# Altium PCB SQUIDCtr_Rev0.PcbDoc (part 1 of 4)
Units mil, origin at the board's own origin, x right, y up, seen from the top; angles counter-clockwise.
Board outline 5765 x 2940 mil, 6 copper layers (Top Layer, Internal Plane 1, Mid-Layer 1, InternalPlane 2, Mid-Layer 2, Bottom Layer), stack 62.5 mil thick; 583 components, 307 nets, 1511 pads, 451 vias.
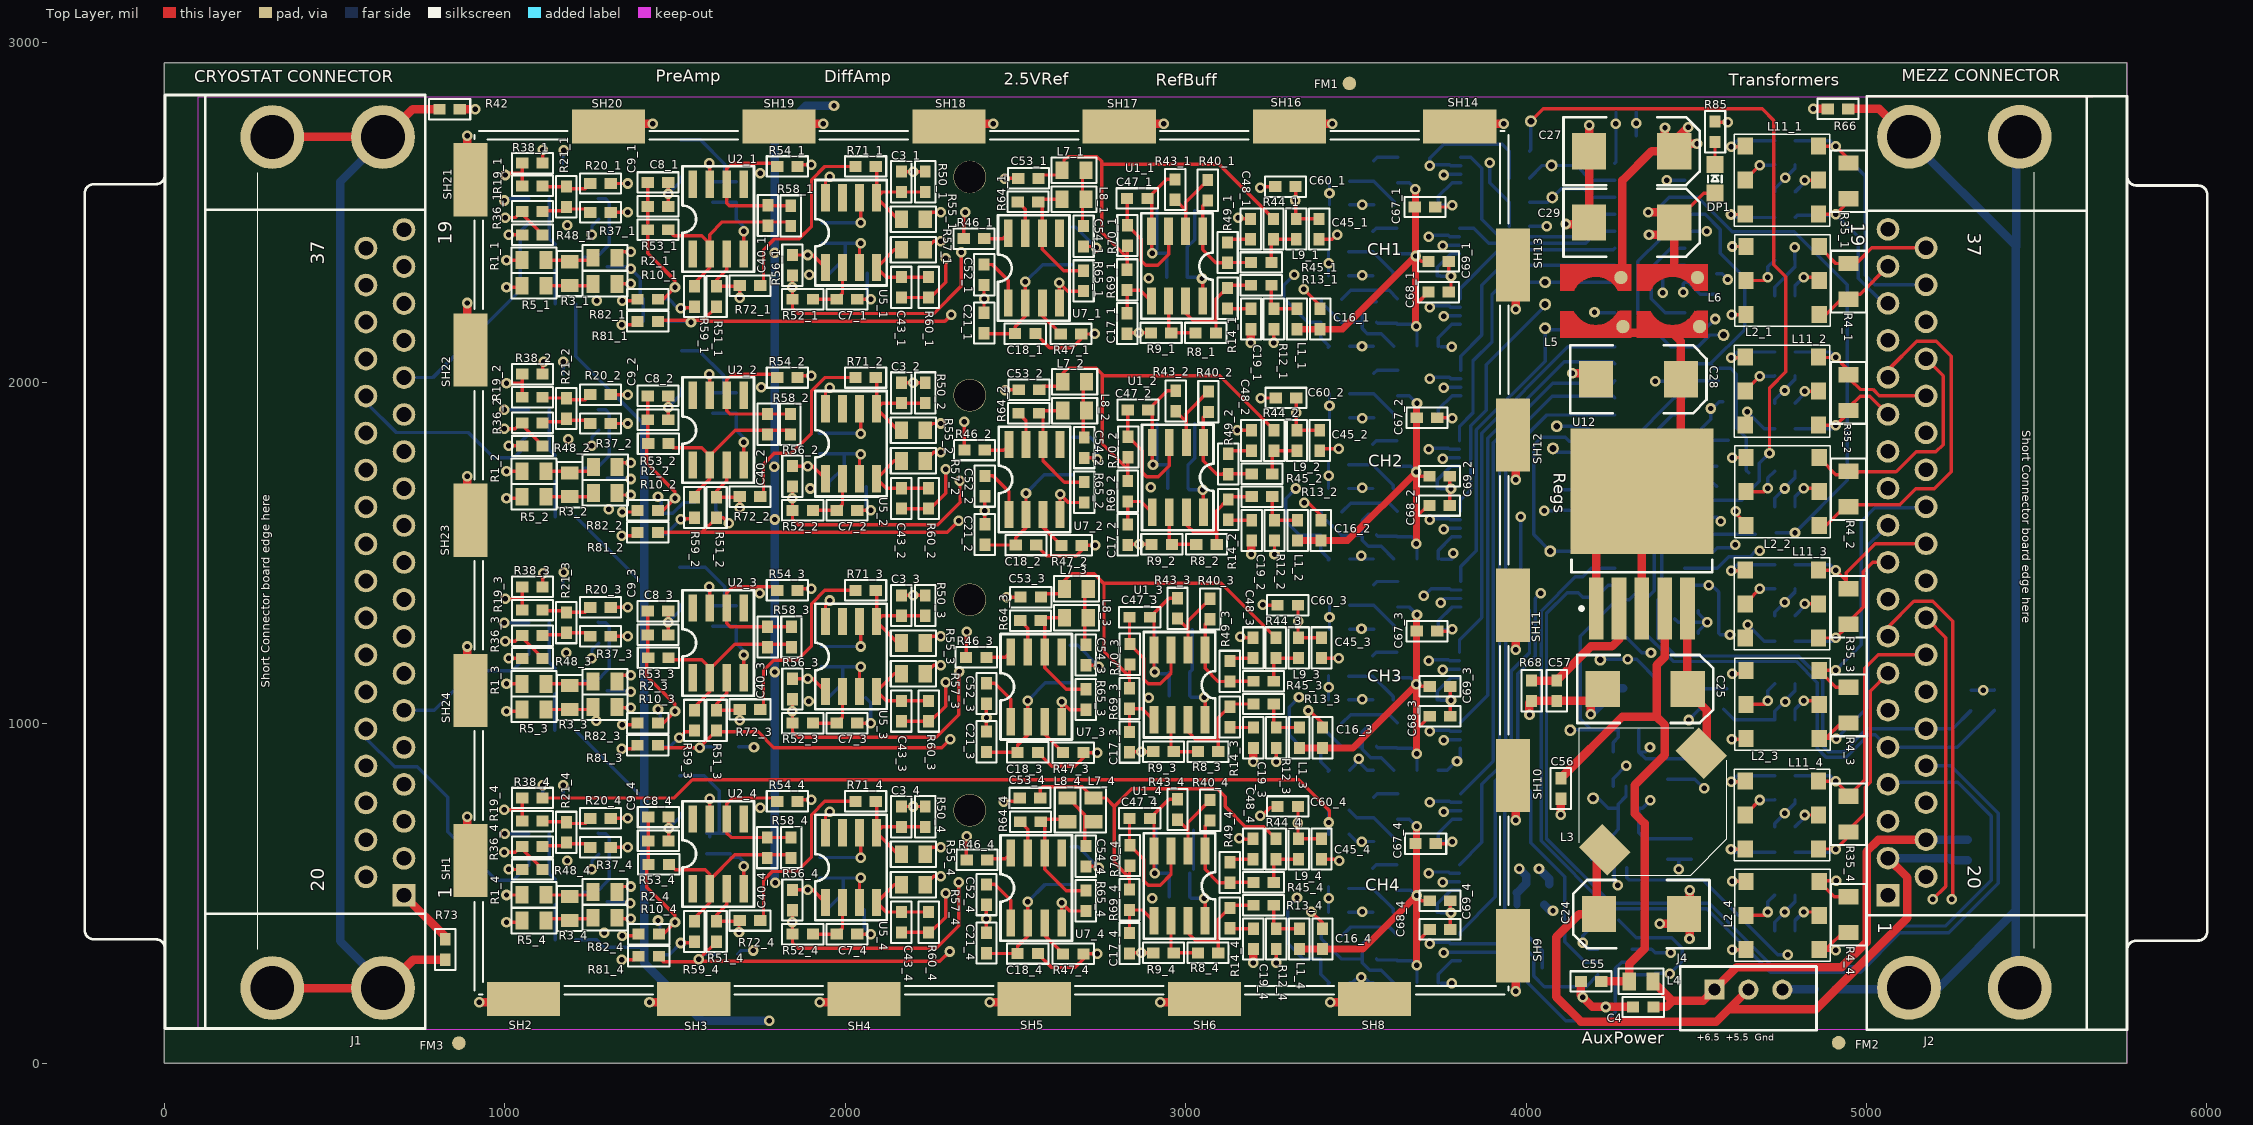
[diagram p0: Top Layer view]
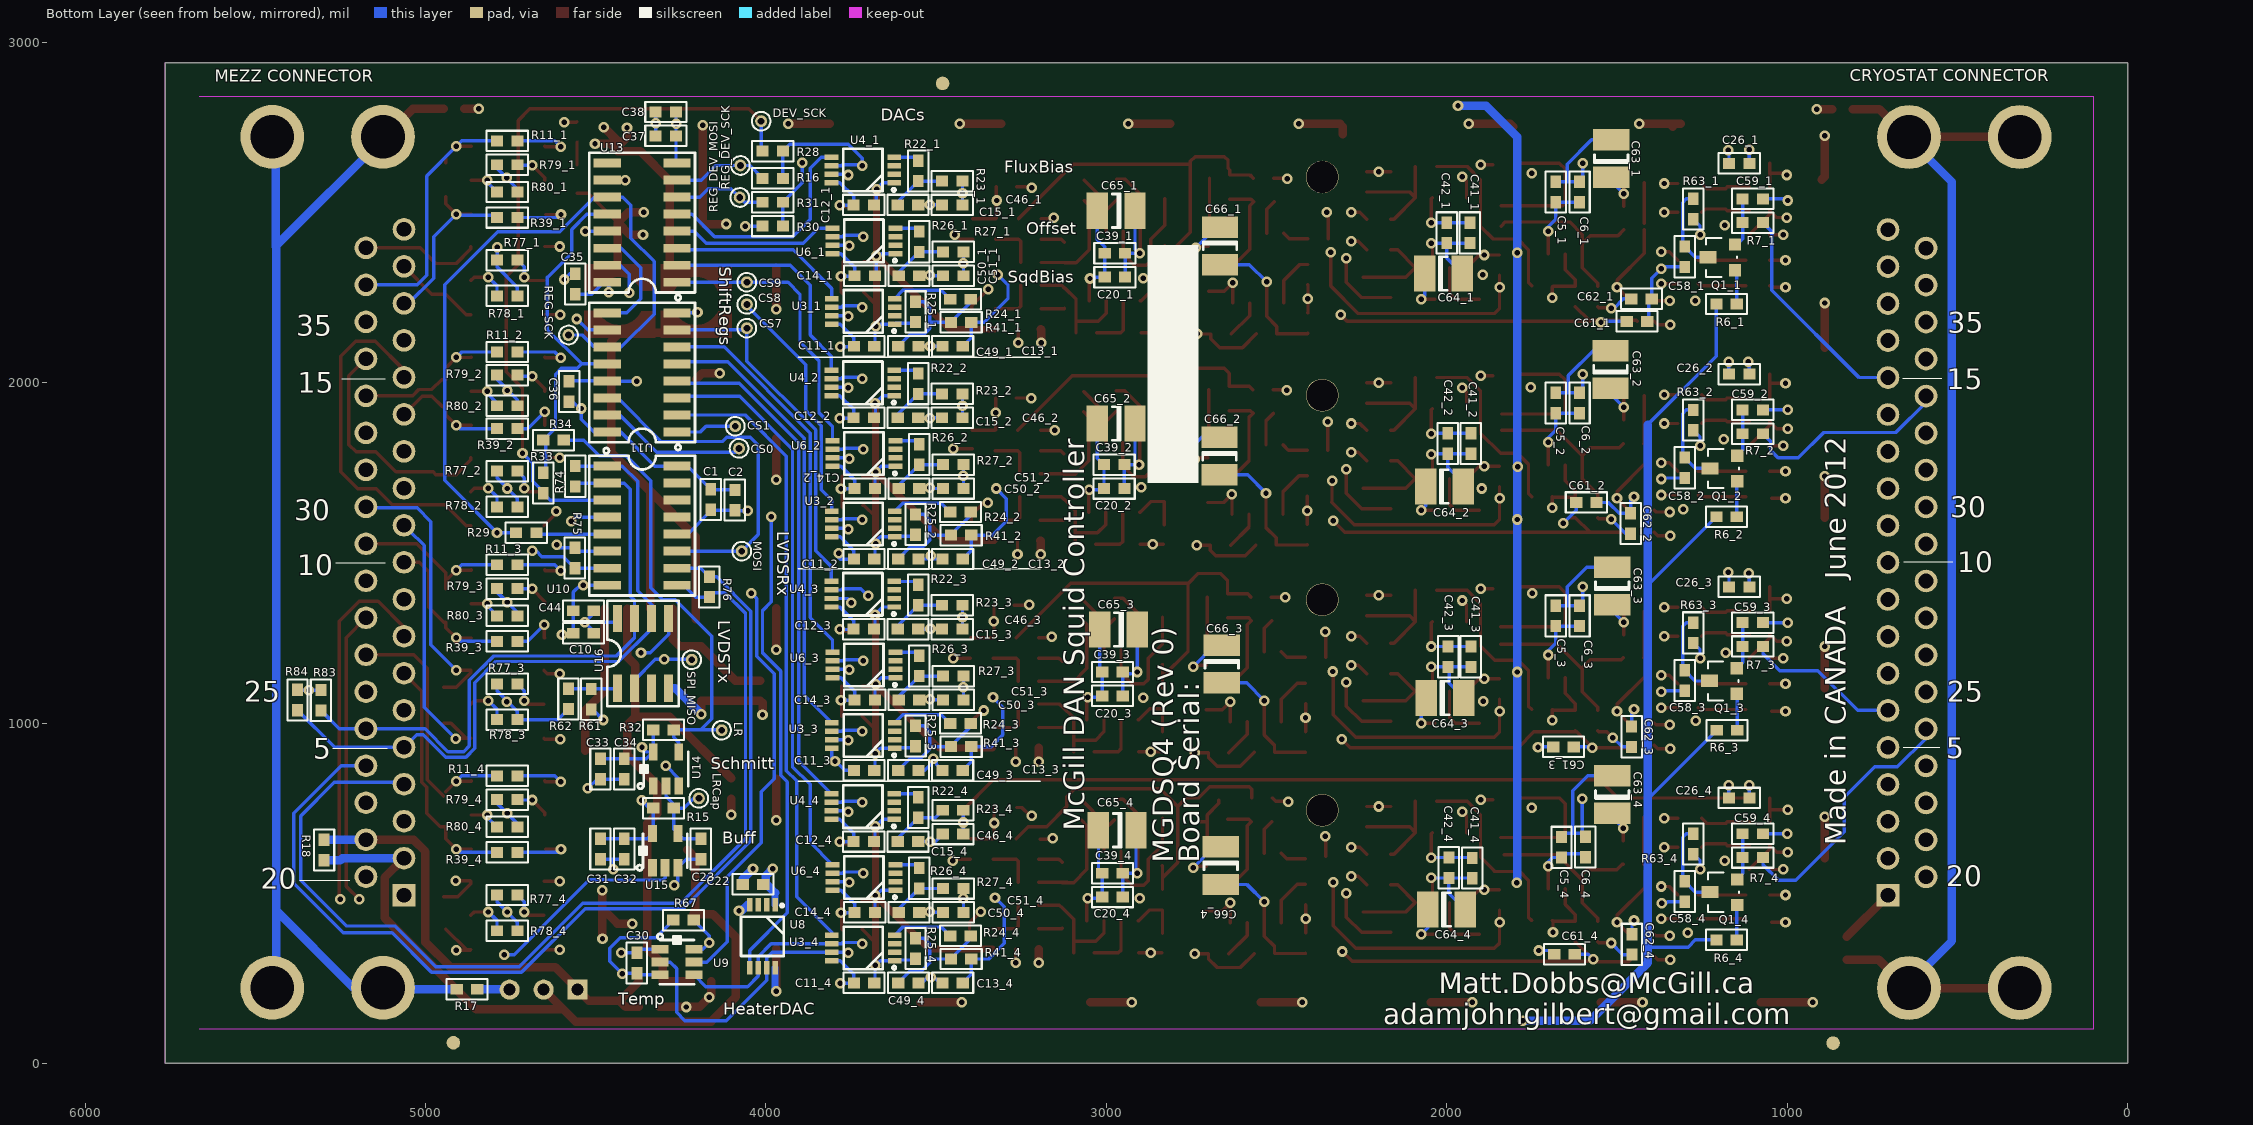
[diagram p1: Bottom Layer view, seen from below]
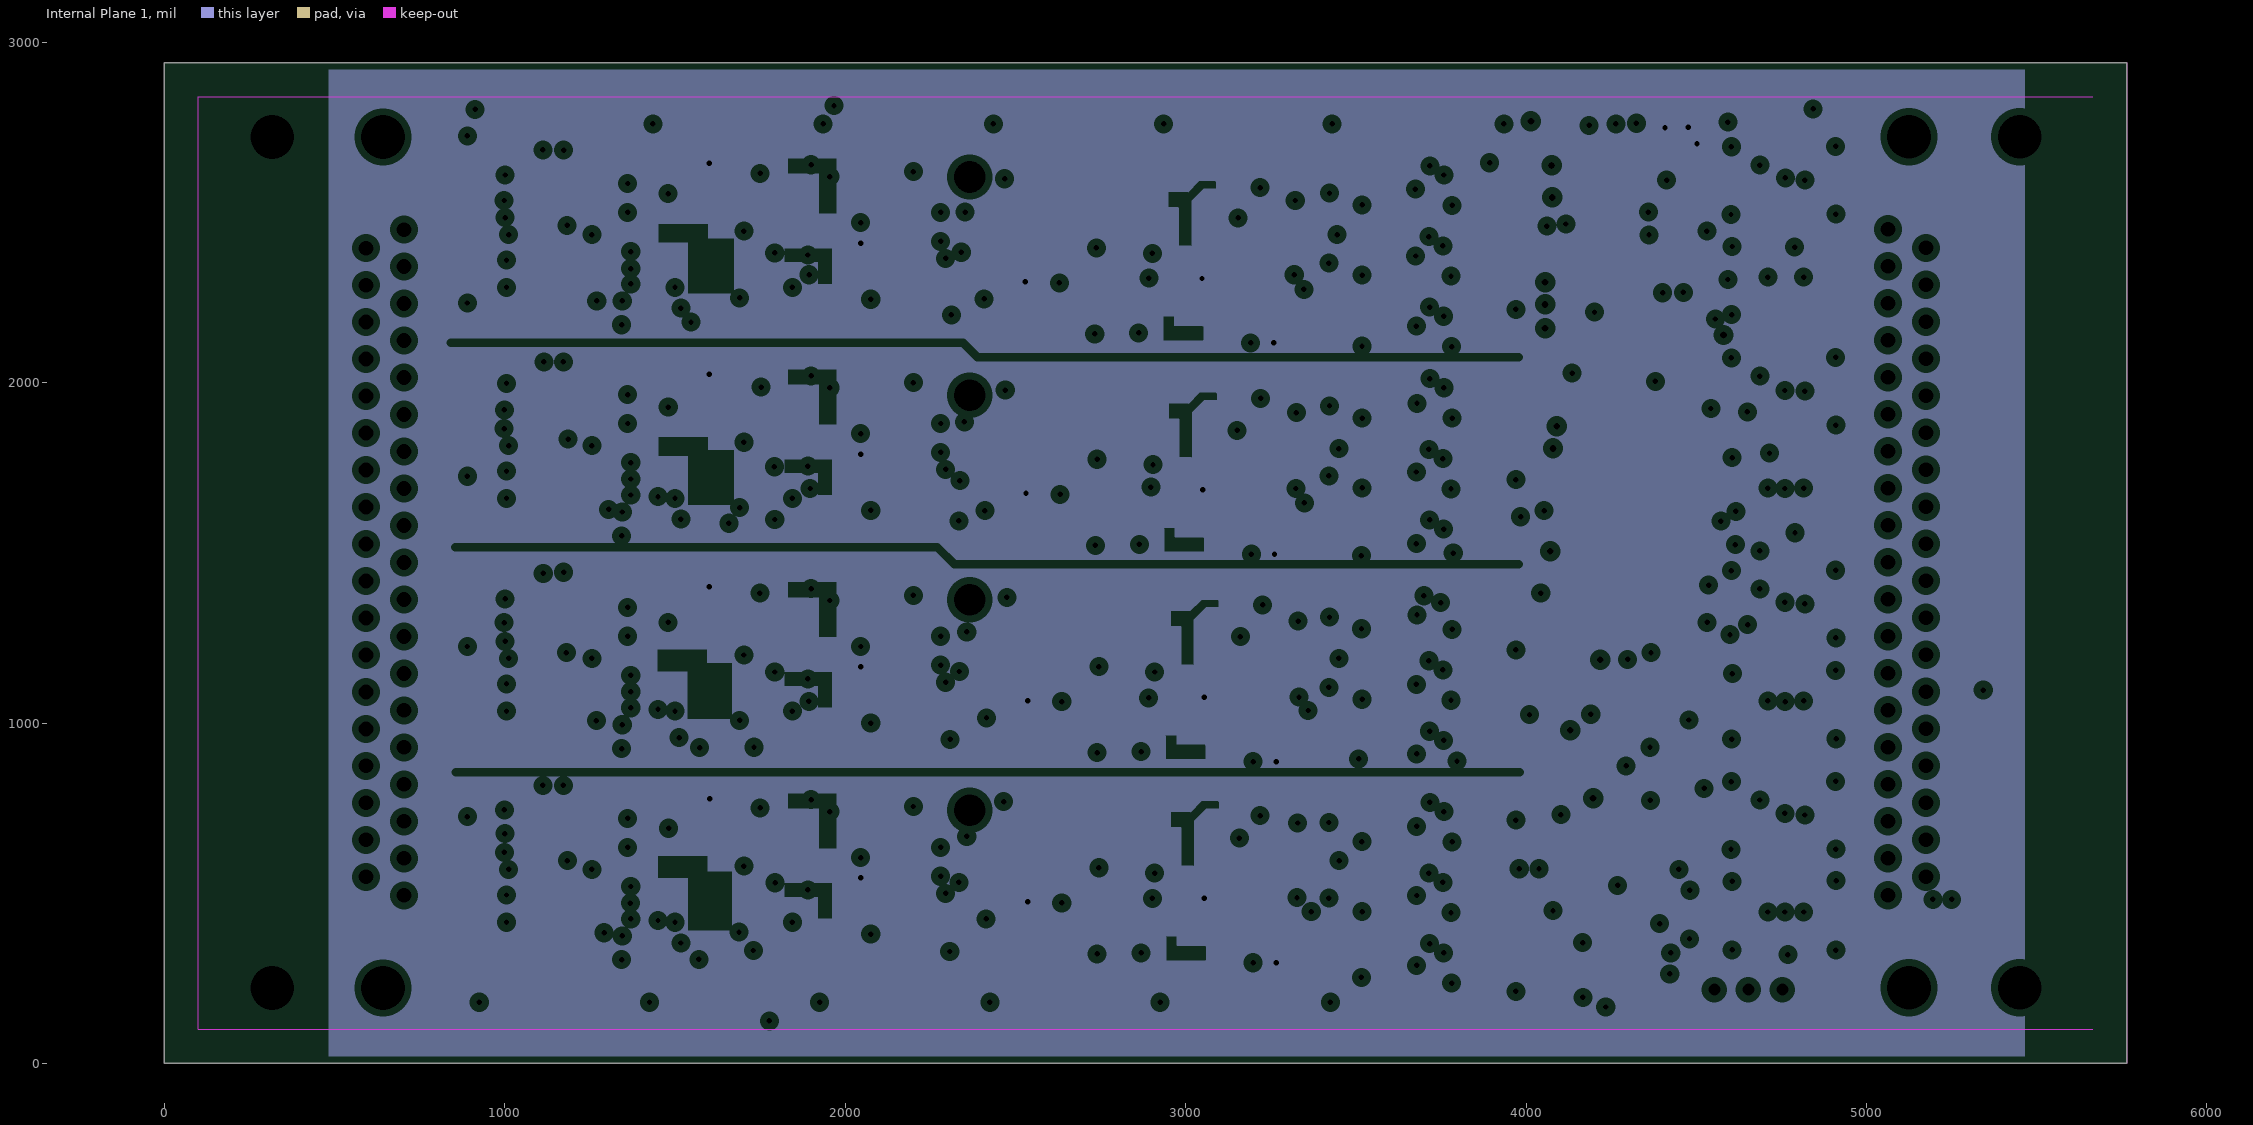
[diagram p2: Internal Plane 1, clearances drawn from the general rule]
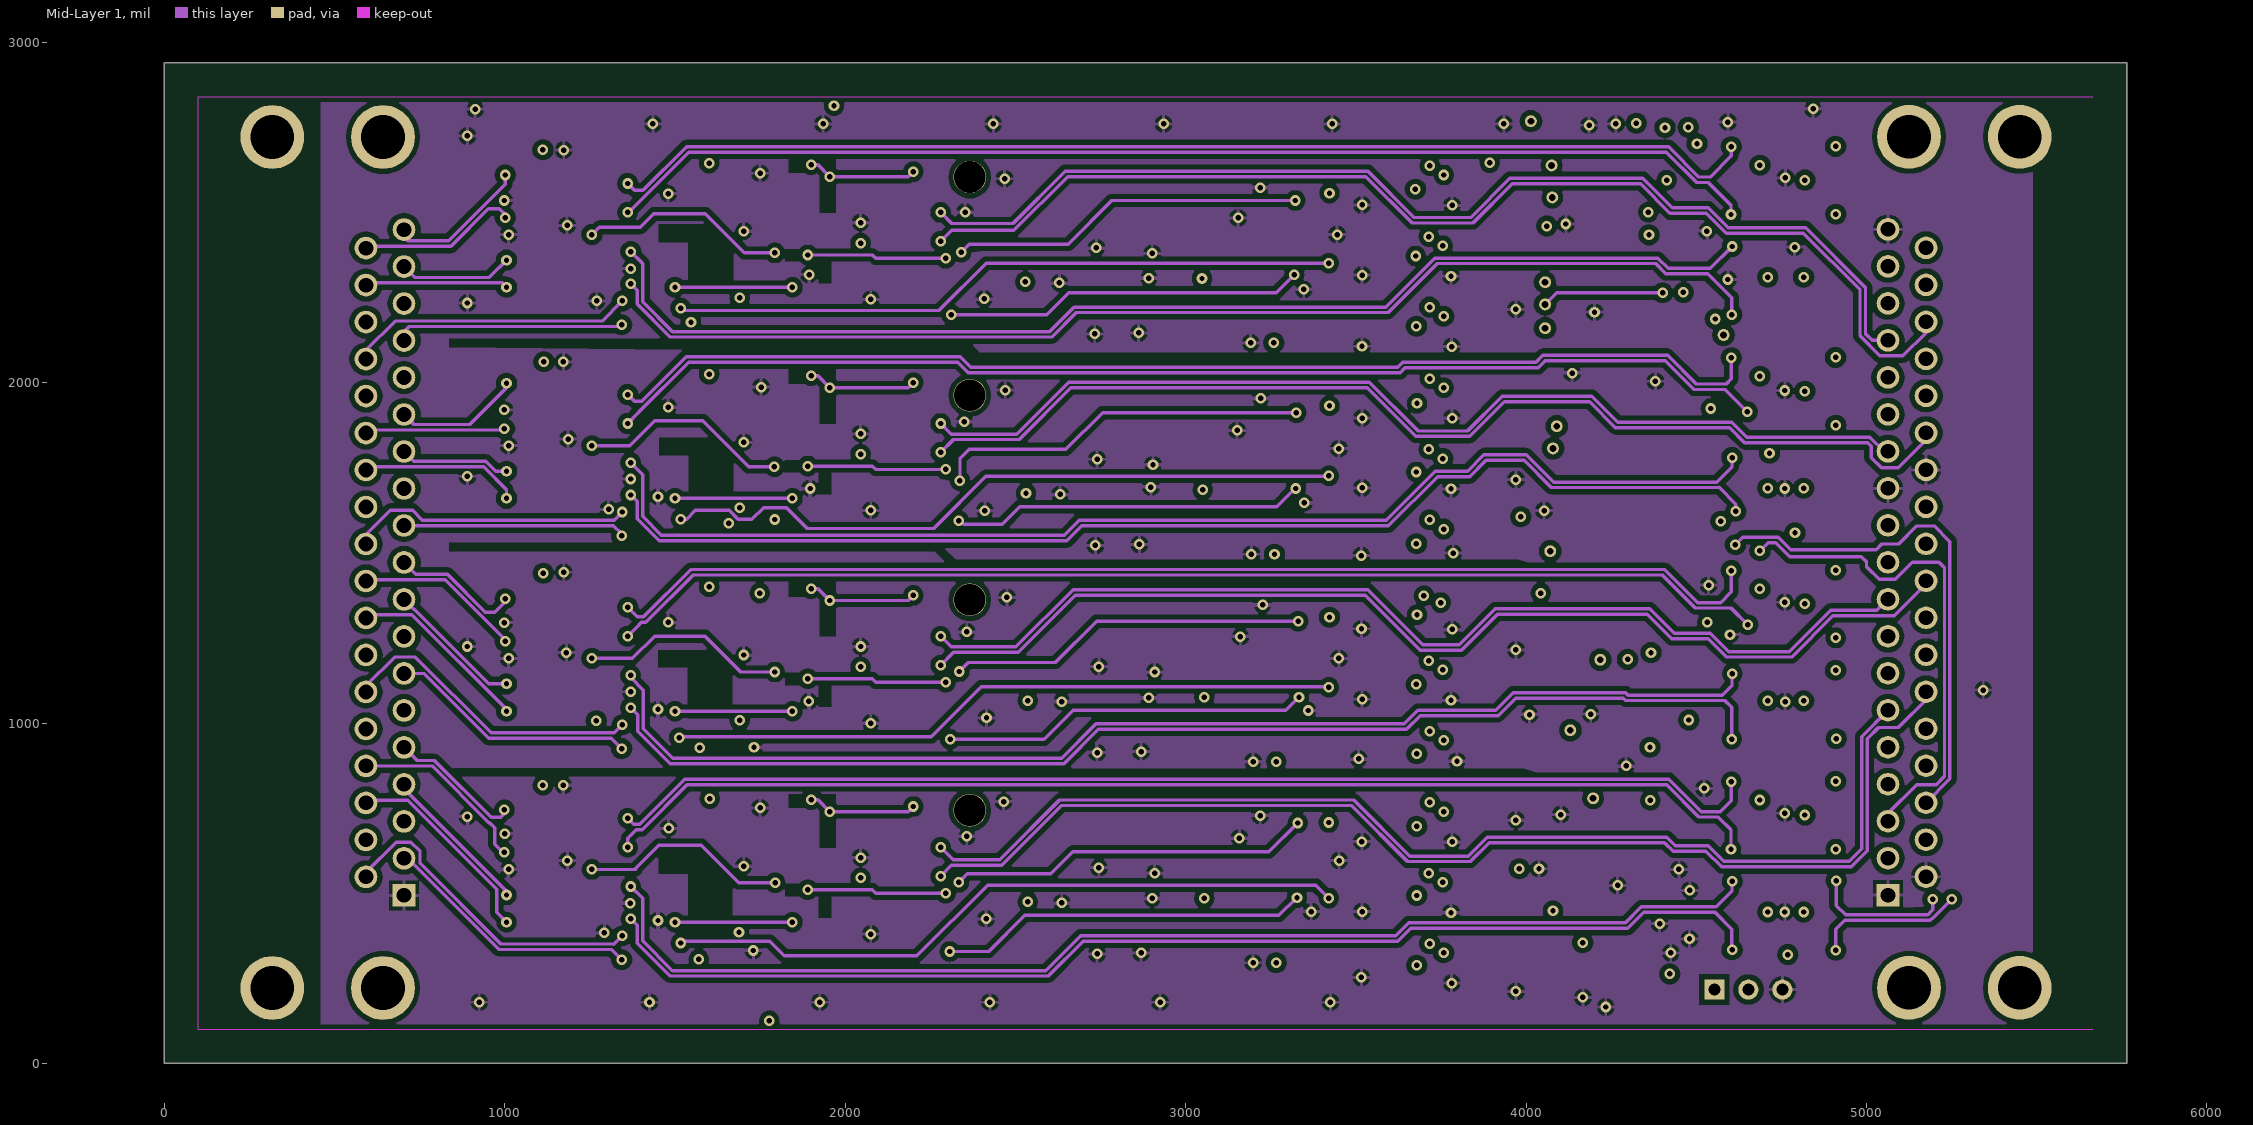
[diagram p3: Mid-Layer 1]
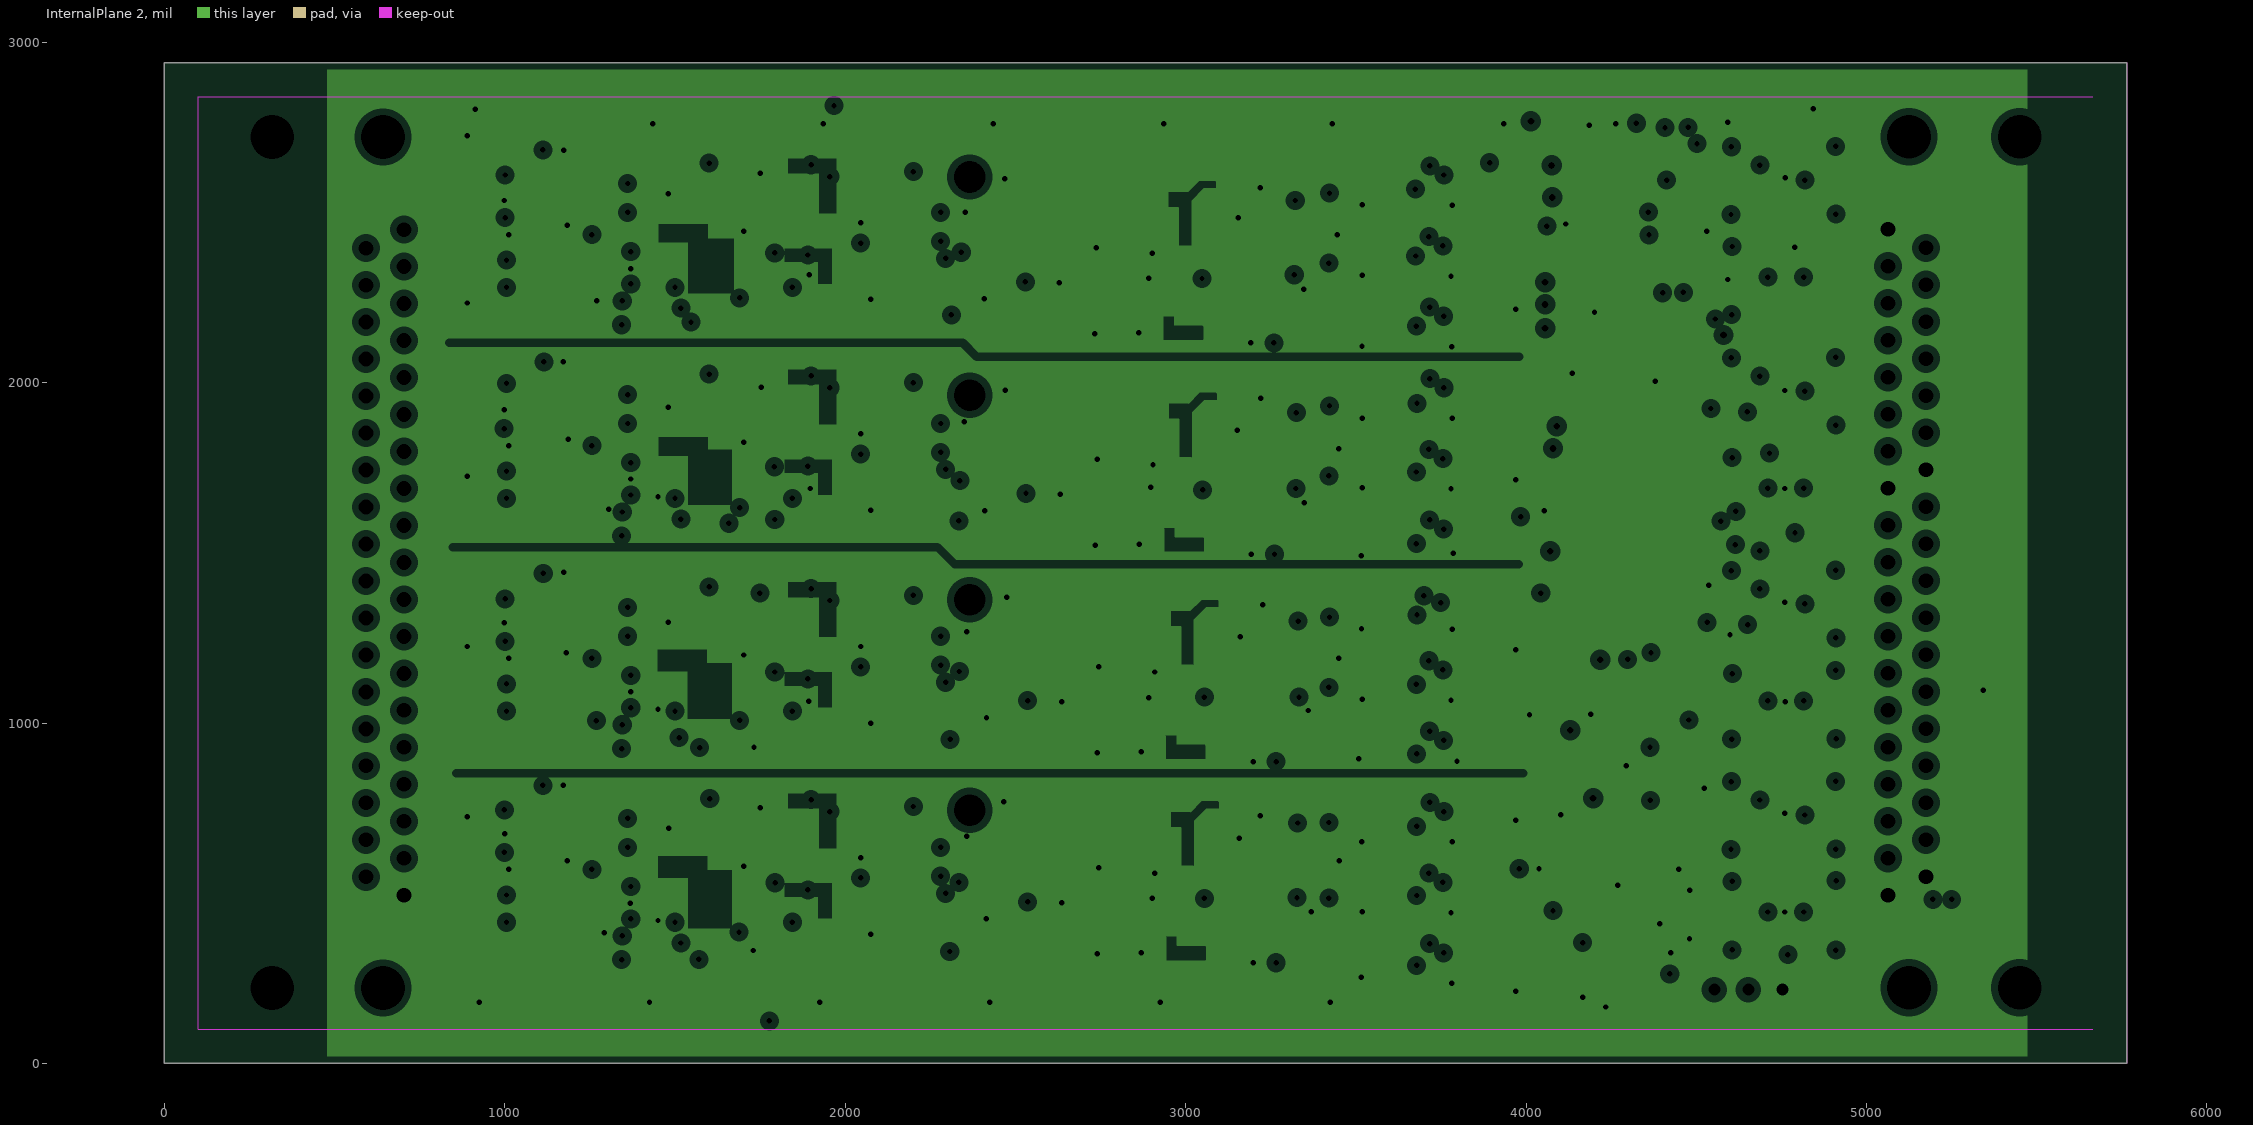
[diagram p4: InternalPlane 2, clearances drawn from the general rule]
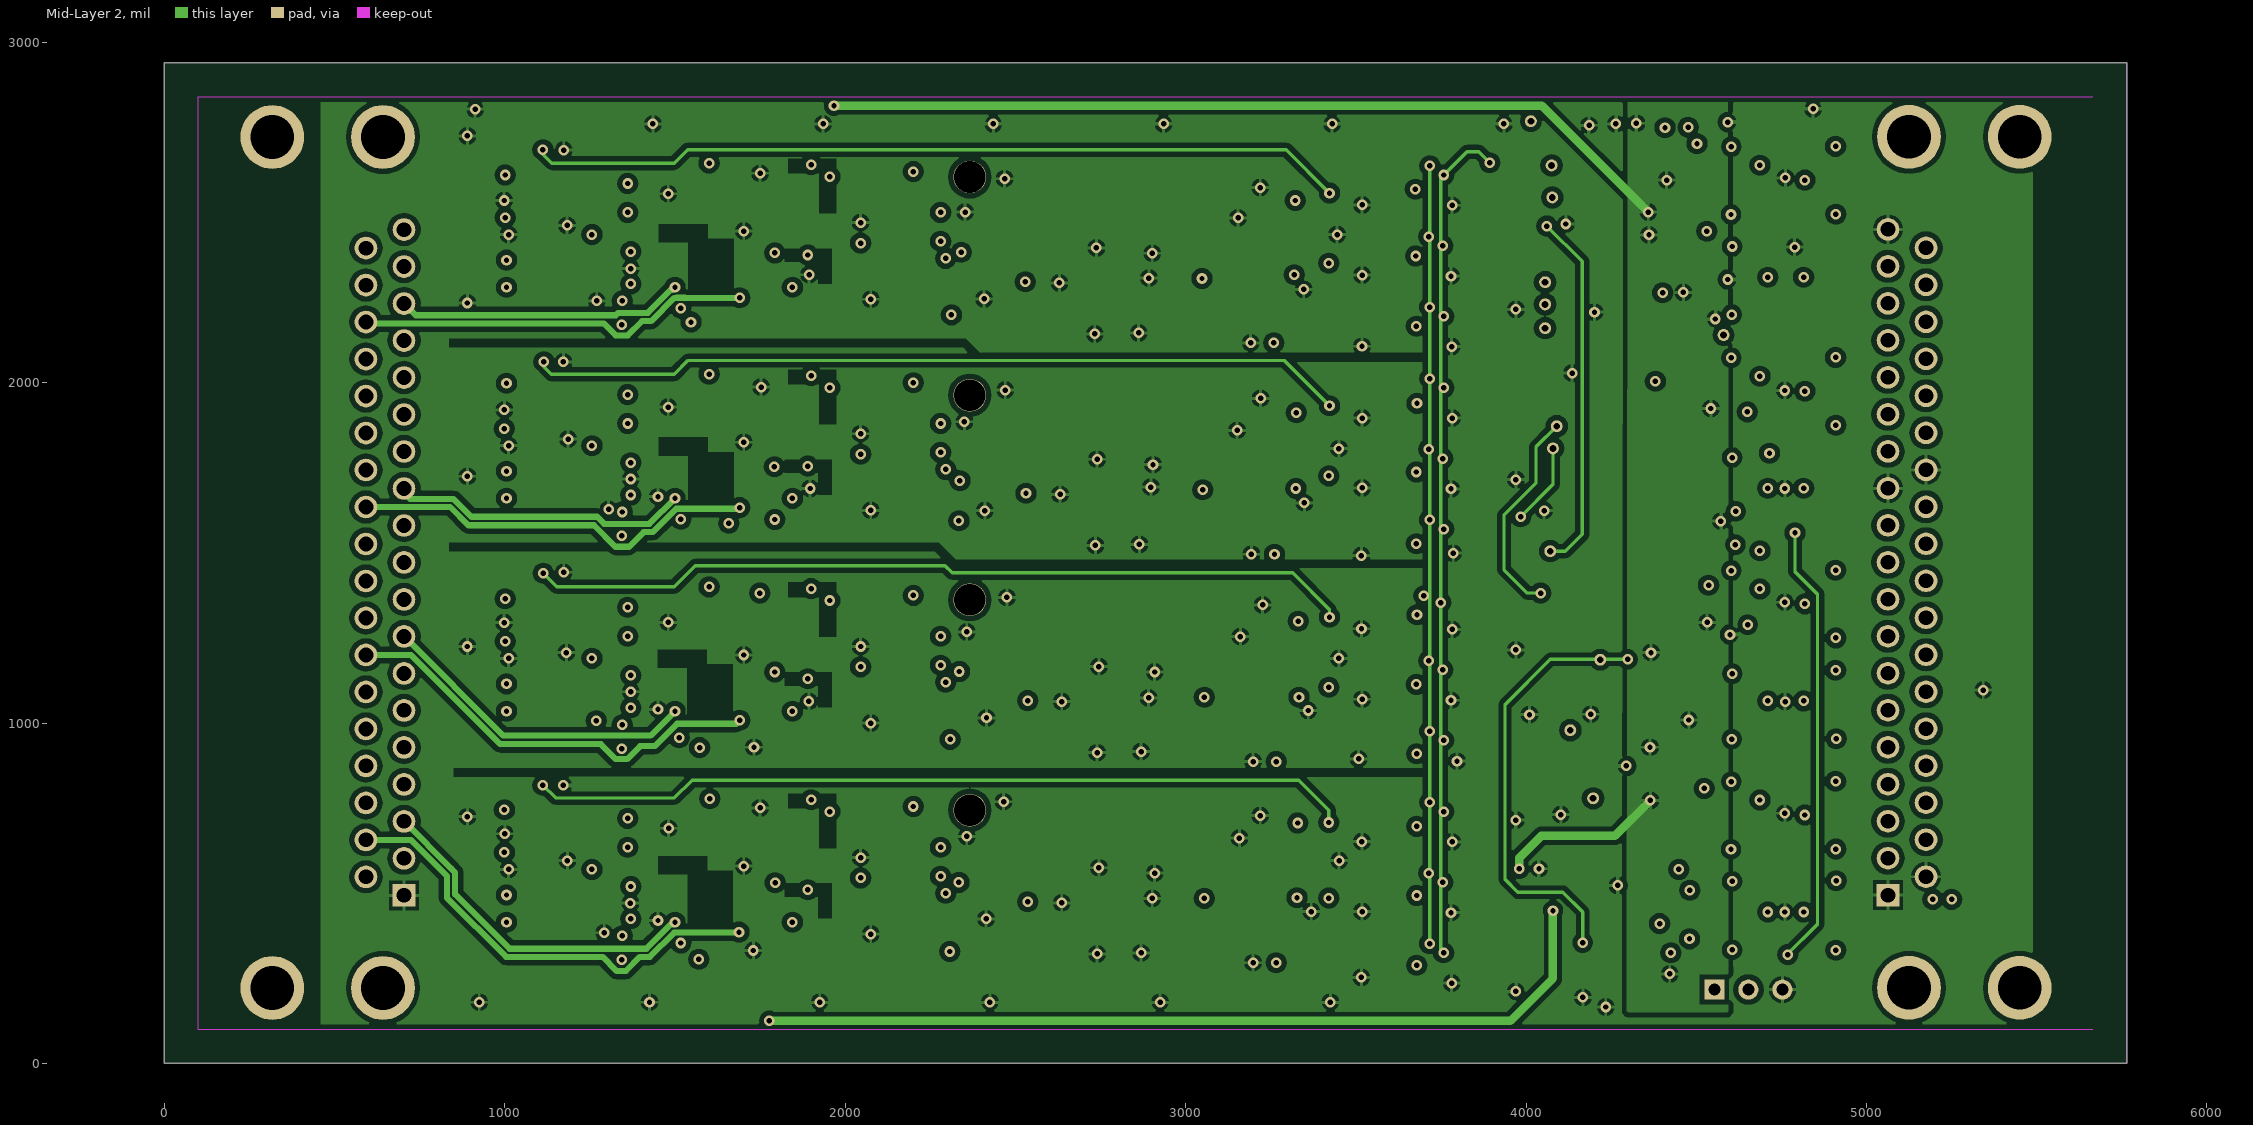
[diagram p5: Mid-Layer 2]

## Layer stack, top to bottom
Top Layer: signal copper 0.7
Dielectric: core 11, FR-4, Dk 4.8
Internal Plane 1: plane copper 1.4, net 5VA
Dielectric: prepreg 13, FR-4, Dk 4.8
Mid-Layer 1: signal copper 1.4
Dielectric: core 7.5, FR-4, Dk 4.8
InternalPlane 2: plane copper 1.4, net GND
Dielectric: prepreg 13, FR-4, Dk 4.8
Mid-Layer 2: signal copper 1.4
Dielectric: core 11, FR-4, Dk 4.8
Bottom Layer: signal copper 0.7

## Board outline
0,0 5765,0 5765,2940 0,2940

## Design rules (kind name [scope] priority, off if disabled: settings)
Clearance ClearanceMid1Poly [(OnLayer('Mid-Layer 1') AND IsRegion)] p1: gap=15
Clearance ClearanceMid2Poly [(OnLayer('Mid-Layer 2') AND IsRegion)] p2: gap=15
Clearance ClearanceMid2 [OnLayer('Mid-Layer 2') vs OnLayer('Mid-Layer 2')] p3: gap=6
Clearance ClearanceMid1 [OnLayer('Mid-Layer 1') vs OnLayer('Mid-Layer 1')] p4: gap=6
Clearance ClearancePoly [(InNamedPolygon('Poly5VD') AND InNet('5VD'))] p5: gap=20
Clearance [All] p6: gap=6
DiffPairsRouting [All] p1: maxlimit=6 minlimit=6 mostfreqgap=6 maxuncoupledlength=500
HoleSize [All] p1: absolutevalues=TRUE maxlimit=150 minlimit=1 maxpercent=80.000 minpercent=20.000
MinimumSolderMaskSliver [All] p1: minsoldermaskwidth=0
PlaneClearance [All] p1: clearance=20
PlaneConnect [All] p1: planeconnectstyle=Relief reliefexpansion=20 reliefentries=4 reliefconductorwidth=10 reliefairgap=10
PolygonConnect [All] p1: connectstyle=Relief reliefconductorwidth=10 reliefentries=4 polygonreliefangle="90 Angle" airgapwidth=10
RoomDefinition REFS4 [InComponentClass('REFS4')] p1 off: confinementstyle=ConfineIn formatcopy=TRUE lockcomponents=FALSE outline 2320,205 5940,205 5940,875 2320,875
RoomDefinition REFS3 [InComponentClass('REFS3')] p2 off: confinementstyle=ConfineIn formatcopy=TRUE lockcomponents=FALSE outline 2320,829 5940,829 5940,1499 2320,1499
RoomDefinition REFS2 [InComponentClass('REFS2')] p3 off: confinementstyle=ConfineIn formatcopy=TRUE lockcomponents=FALSE outline 2320,1450 5940,1450 5940,2120 2320,2120
RoomDefinition REFS1 [InComponentClass('REFS1')] p4 off: confinementstyle=ConfineIn formatcopy=TRUE lockcomponents=FALSE outline 2320,2075 5940,2075 5940,2745 2320,2745
RoomDefinition CH4 [InComponentClass('CH4')] p5 off: confinementstyle=ConfineIn formatcopy=TRUE lockcomponents=FALSE outline 970,280 4955,280 4955,880 970,880
RoomDefinition CH3 [InComponentClass('CH3')] p6 off: confinementstyle=ConfineIn formatcopy=TRUE lockcomponents=FALSE outline 970,900 4955,900 4955,1500 970,1500
RoomDefinition CH2 [InComponentClass('CH2')] p7 off: confinementstyle=ConfineIn formatcopy=TRUE lockcomponents=FALSE outline 970,1525 4955,1525 4955,2125 970,2125
RoomDefinition CH1 [InComponentClass('CH1')] p8 off: confinementstyle=ConfineIn formatcopy=TRUE lockcomponents=FALSE outline 970,2145 4955,2145 4955,2745 970,2745
RoutingVias [All] p1: holewidth=16 width=31 viastyle="Through Hole" minholewidth=8 minwidth=25 maxholewidth=251 maxwidth=268
SilkToSilkClearance [All] p1: silktosilkclearance=0
SilkscreenOverComponentPads [All] p1: minsilkscreentomaskgap=0
SolderMaskExpansion [All] p1: expansion=4
Width Width_DiffPairs [(InDifferentialPairClass('All Differential Pairs'))] p1: maxlimit=18 minlimit=10 preferedwidth=18 toplayer_maxwidth=10 toplayer_prefwidth=10 midlayer1_maxwidth=10 midlayer1_prefwidth=10 midlayer2_minwidth=18 bottomlayer_maxwidth=10 bottomlayer_prefwidth=10 minimp=50.000000 maximp=50.000000 favimp=50.000000
Width [All] p2: maxlimit=50 minlimit=10 preferedwidth=10
21 further rules are at their usual default settings.

## Classes and differential pairs
component class SQUIDCtrl_Rev0: C22 C30 J1 J2 R17 R18 R42 R66 R73 U8 U9
net class SPI_CS[15..0]: CS14 CS15 SPI_CS0 SPI_CS1 SPI_CS2 SPI_CS3 SPI_CS4 SPI_CS5 SPI_CS6 SPI_CS7 SPI_CS8 SPI_CS9 SPI_CS10 SPI_CS11 SPI_CS12 SPI_CS13
component class Power: C4 C24 C25 C27 C28 C29 C55 C56 C57 DP1 FM1 FM2 FM3 J4 L3 L4 L5 L6 R68 R85 SH1 SH2 SH3 SH4 SH5 SH6 SH8 SH9 SH10 SH11 SH12 SH13 SH14 SH16 SH17 SH18 SH19 SH20 SH21 SH22 SH23 SH24 U12
component class Control: C1 C2 C10 C23 C31 C32 C33 C34 C35 C36 C37 C38 C44 CS0 CS1 CS7 CS8 CS9 DEV_SCK LR LRCap MOSI R15 R16 R28 R29 R30 R31 R32 R33 R34 R61 R62 R67 R74 R75 R76 R83 R84 REG_DEV_MOSI REG_DEV_SCK REG_SCK SPI_MISO U10 U11 U13 U14 U15 U16
component class REFS4: C11_4 C12_4 C13_4 C14_4 C15_4 C16_4 C17_4 C18_4 C19_4 C20_4 C21_4 C26_4 C39_4 C45_4 C46_4 C47_4 C48_4 C49_4 C50_4 C51_4 C52_4 C53_4 C54_4 C60_4 C61_4 C62_4 C65_4 C66_4 C67_4 C68_4 C69_4 L1_4 L7_4 L8_4 L9_4 R8_4 R9_4 R12_4 R13_4 R14_4 R22_4 R23_4 R24_4 R25_4 R26_4 R27_4 R40_4 R41_4 R43_4 R44_4 R45_4 R46_4 R47_4 R49_4 R64_4 R65_4 R69_4 R70_4 U1_4 U3_4 U4_4 U6_4 U7_4
component class REFS3: C11_3 C12_3 C13_3 C14_3 C15_3 C16_3 C17_3 C18_3 C19_3 C20_3 C21_3 C26_3 C39_3 C45_3 C46_3 C47_3 C48_3 C49_3 C50_3 C51_3 C52_3 C53_3 C54_3 C60_3 C61_3 C62_3 C65_3 C66_3 C67_3 C68_3 C69_3 L1_3 L7_3 L8_3 L9_3 R8_3 R9_3 R12_3 R13_3 R14_3 R22_3 R23_3 R24_3 R25_3 R26_3 R27_3 R40_3 R41_3 R43_3 R44_3 R45_3 R46_3 R47_3 R49_3 R64_3 R65_3 R69_3 R70_3 U1_3 U3_3 U4_3 U6_3 U7_3
component class REFS2: C11_2 C12_2 C13_2 C14_2 C15_2 C16_2 C17_2 C18_2 C19_2 C20_2 C21_2 C26_2 C39_2 C45_2 C46_2 C47_2 C48_2 C49_2 C50_2 C51_2 C52_2 C53_2 C54_2 C60_2 C61_2 C62_2 C65_2 C66_2 C67_2 C68_2 C69_2 L1_2 L7_2 L8_2 L9_2 R8_2 R9_2 R12_2 R13_2 R14_2 R22_2 R23_2 R24_2 R25_2 R26_2 R27_2 R40_2 R41_2 R43_2 R44_2 R45_2 R46_2 R47_2 R49_2 R64_2 R65_2 R69_2 R70_2 U1_2 U3_2 U4_2 U6_2 U7_2
channel class SQUID_Channel: CH1 CH2 CH3 CH4
component class REFS1: C11_1 C12_1 C13_1 C14_1 C15_1 C16_1 C17_1 C18_1 C19_1 C20_1 C21_1 C26_1 C39_1 C45_1 C46_1 C47_1 C48_1 C49_1 C50_1 C51_1 C52_1 C53_1 C54_1 C60_1 C61_1 C62_1 C65_1 C66_1 C67_1 C68_1 C69_1 CH1_U5 L1_1 L7_1 L8_1 L9_1 R8_1 R9_1 R12_1 R13_1 R14_1 R22_1 R23_1 R24_1 R25_1 R26_1 R27_1 R40_1 R41_1 R43_1 R44_1 R45_1 R46_1 R47_1 R49_1 R64_1 R65_1 R69_1 R70_1 U1_1 U3_1 U4_1 U6_1 U7_1
component class CH1: C3_1 C5_1 C6_1 C7_1 C8_1 C9_1 C40_1 C41_1 C42_1 C43_1 C58_1 C59_1 C63_1 C64_1 L2_1 L11_1 Q1_1 R1_1 R2_1 R3_1 R4_1 R5_1 R6_1 R7_1 R10_1 R11_1 R19_1 R20_1 R21_1 R35_1 R36_1 R37_1 R38_1 R39_1 R48_1 R50_1 R51_1 R52_1 R53_1 R54_1 R55_1 R56_1 R57_1 R58_1 R59_1 R60_1 R63_1 R71_1 R72_1 R77_1 R78_1 R79_1 R80_1 R81_1 R82_1 U2_1 U5_1
component class CH2: C3_2 C5_2 C6_2 C7_2 C8_2 C9_2 C40_2 C41_2 C42_2 C43_2 C58_2 C59_2 C63_2 C64_2 L2_2 L11_2 Q1_2 R1_2 R2_2 R3_2 R4_2 R5_2 R6_2 R7_2 R10_2 R11_2 R19_2 R20_2 R21_2 R35_2 R36_2 R37_2 R38_2 R39_2 R48_2 R50_2 R51_2 R52_2 R53_2 R54_2 R55_2 R56_2 R57_2 R58_2 R59_2 R60_2 R63_2 R71_2 R72_2 R77_2 R78_2 R79_2 R80_2 R81_2 R82_2 U2_2 U5_2
component class CH3: C3_3 C5_3 C6_3 C7_3 C8_3 C9_3 C40_3 C41_3 C42_3 C43_3 C58_3 C59_3 C63_3 C64_3 L2_3 L11_3 Q1_3 R1_3 R2_3 R3_3 R4_3 R5_3 R6_3 R7_3 R10_3 R11_3 R19_3 R20_3 R21_3 R35_3 R36_3 R37_3 R38_3 R39_3 R48_3 R50_3 R51_3 R52_3 R53_3 R54_3 R55_3 R56_3 R57_3 R58_3 R59_3 R60_3 R63_3 R71_3 R72_3 R77_3 R78_3 R79_3 R80_3 R81_3 R82_3 U2_3 U5_3
component class CH4: C3_4 C5_4 C6_4 C7_4 C8_4 C9_4 C40_4 C41_4 C42_4 C43_4 C58_4 C59_4 C63_4 C64_4 L2_4 L11_4 Q1_4 R1_4 R2_4 R3_4 R4_4 R5_4 R6_4 R7_4 R10_4 R11_4 R19_4 R20_4 R21_4 R35_4 R36_4 R37_4 R38_4 R39_4 R48_4 R50_4 R51_4 R52_4 R53_4 R54_4 R55_4 R56_4 R57_4 R58_4 R59_4 R60_4 R63_4 R71_4 R72_4 R77_4 R78_4 R79_4 R80_4 R81_4 R82_4 U2_4 U5_4
channel class SQUID_Channel_DACS: Designator1 Designator2 Designator3 Designator4
differential pair CH4_CRYO.SQUID_BIAS: +CH4_CRYO.SQUID_BIAS_P -CH4_CRYO.SQUID_BIAS_N
differential pair CH3_CRYO.SQUID_BIAS: +CH3_CRYO.SQUID_BIAS_P -CH3_CRYO.SQUID_BIAS_N
differential pair CH2_CRYO.SQUID_BIAS: +CH2_CRYO.SQUID_BIAS_P -CH2_CRYO.SQUID_BIAS_N
differential pair CH1_CRYO.SQUID_BIAS: +CH1_CRYO.SQUID_BIAS_P -CH1_CRYO.SQUID_BIAS_N
differential pair CH4_CRYO.SQUID_SENSE: +CH4_CRYO.SQUID_SENSE_P -CH4_CRYO.SQUID_SENSE_N
differential pair CH3_CRYO.SQUID_SENSE: +CH3_CRYO.SQUID_SENSE_P -CH3_CRYO.SQUID_SENSE_N
differential pair CH2_CRYO.SQUID_SENSE: +CH2_CRYO.SQUID_SENSE_P -CH2_CRYO.SQUID_SENSE_N
differential pair CH1_CRYO.SQUID_SENSE: +CH1_CRYO.SQUID_SENSE_P -CH1_CRYO.SQUID_SENSE_N
differential pair CH4_CRYO.SQUID_COIL: +CH4_CRYO.SQUID_COIL_P -CH4_CRYO.SQUID_COIL_N
differential pair CH4_CRYO.BOLO: +CH4_CRYO.BOLO_P -CH4_CRYO.BOLO_N
differential pair CH3_CRYO.SQUID_COIL: +CH3_CRYO.SQUID_COIL_P -CH3_CRYO.SQUID_COIL_N
differential pair CH3_CRYO.BOLO: +CH3_CRYO.BOLO_P -CH3_CRYO.BOLO_N
differential pair CH2_CRYO.SQUID_COIL: +CH2_CRYO.SQUID_COIL_P -CH2_CRYO.SQUID_COIL_N
differential pair CH2_CRYO.BOLO: +CH2_CRYO.BOLO_P -CH2_CRYO.BOLO_N
differential pair CH1_CRYO.SQUID_COIL: +CH1_CRYO.SQUID_COIL_P -CH1_CRYO.SQUID_COIL_N
differential pair CH1_CRYO.BOLO: +CH1_CRYO.BOLO_P -CH1_CRYO.BOLO_N
differential pair NULLER_4: +NULLER_4_P -NULLER_4_N
differential pair NULLER_3: +NULLER_3_P -NULLER_3_N
differential pair NULLER_2: +NULLER_2_P -NULLER_2_N
differential pair NULLER_1: +NULLER_1_P -NULLER_1_N
differential pair CARRIER_4: +CARRIER_4_P -CARRIER_4_N
differential pair CARRIER_3: +CARRIER_3_P -CARRIER_3_N
differential pair CARRIER_2: +CARRIER_2_P -CARRIER_2_N
differential pair CARRIER_1: +CARRIER_1_P -CARRIER_1_N
differential pair CH1_MEZZ.SQUID_OUT: +CH1_MEZZ.SQUID_OUT_P -CH1_MEZZ.SQUID_OUT_N
differential pair CH2_MEZZ.SQUID_OUT: +CH2_MEZZ.SQUID_OUT_P -CH2_MEZZ.SQUID_OUT_N
differential pair CH3_MEZZ.SQUID_OUT: +CH3_MEZZ.SQUID_OUT_P -CH3_MEZZ.SQUID_OUT_N
differential pair CH4_MEZZ.SQUID_OUT: +CH4_MEZZ.SQUID_OUT_P -CH4_MEZZ.SQUID_OUT_N
differential pair CH1_MEZZ.BIAS: +CH1_MEZZ.BIAS_P -CH1_MEZZ.BIAS_N
differential pair CH1_MEZZ.NULLER: +CH1_MEZZ.NULLER_P -CH1_MEZZ.NULLER_N
differential pair CH2_MEZZ.BIAS: +CH2_MEZZ.BIAS_P -CH2_MEZZ.BIAS_N
differential pair CH2_MEZZ.NULLER: +CH2_MEZZ.NULLER_P -CH2_MEZZ.NULLER_N
differential pair CH3_MEZZ.BIAS: +CH3_MEZZ.BIAS_P -CH3_MEZZ.BIAS_N
differential pair CH3_MEZZ.NULLER: +CH3_MEZZ.NULLER_P -CH3_MEZZ.NULLER_N
differential pair CH4_MEZZ.BIAS: +CH4_MEZZ.BIAS_P -CH4_MEZZ.BIAS_N
differential pair CH4_MEZZ.NULLER: +CH4_MEZZ.NULLER_P -CH4_MEZZ.NULLER_N
differential pair DEV_SCLK_MISO: +DEV_SCLK_MISO_P -DEV_SCLK_MISO_N
differential pair MOSI: +MOSI_P -MOSI_N
differential pair REG_SCLK: +REG_SCLK_P -REG_SCLK_N

## Components (designator, comment, footprint, x,y, rotation, side; value= is the part's Value field where it differs from the comment)
C1 "0.1uF" 0603 4162,1627 r90 bottom
C2 "1nF" 0603 4091,1625 r90 bottom
C3_1 "5pF" 0603 2165,2560 r90 top (schematic designator C3)
C3_2 "5pF" 0603 2165,1940 r90 top (schematic designator C3)
C3_3 "5pF" 0603 2165,1315 r90 top (schematic designator C3)
C3_4 "5pF" 0603 2165,695 r90 top (schematic designator C3)
C4 "10uF" 0603 4314,166 r0 top
C5_1 "0.1uF" 0603 1680,2530 r90 bottom (schematic designator C5)
C5_2 "0.1uF" 0603 1680,1910 r90 bottom (schematic designator C5)
C5_3 "0.1uF" 0603 1680,1285 r90 bottom (schematic designator C5)
C5_4 "0.1uF" 0603 1663,605 r90 bottom (schematic designator C5)
C6_1 "1nF" 0603 1610,2530 r90 bottom (schematic designator C6)
C6_2 "1nF" 0603 1610,1910 r90 bottom (schematic designator C6)
C6_3 "1nF" 0603 1610,1285 r90 bottom (schematic designator C6)
C6_4 "1nF" 0603 1593,606 r90 bottom (schematic designator C6)
C7_1 "1nF" 0603 2035,2245 r180 top (schematic designator C7)
C7_2 "1nF" 0603 2035,1625 r180 top (schematic designator C7)
C7_3 "1nF" 0603 2035,1000 r180 top (schematic designator C7)
C7_4 "1nF" 0603 2035,380 r180 top (schematic designator C7)
C8_1 "0.1uF" 0603 1480,2588 r180 top (schematic designator C8)
C8_2 "0.1uF" 0603 1480.07,1961.07 r180 top (schematic designator C8)
C8_3 "0.1uF" 0603 1480,1329 r180 top (schematic designator C8)
C8_4 "0.1uF" 0603 1481,724 r180 top (schematic designator C8)
C9_1 "1nF" 0603 1480,2518 r180 top (schematic designator C9)
C9_2 "1nF" 0603 1480.07,1891.07 r180 top (schematic designator C9)
C9_3 "1nF" 0603 1480,1259 r180 top (schematic designator C9)
C9_4 "1nF" 0603 1481,654 r180 top (schematic designator C9)
C10 "0.1uF" 0603 4566,1264 r180 bottom
C11_1 "0.1uF" 0603 3681.5,2107 r0 bottom (schematic designator C11)
C11_2 "0.1uF" 0603 3681.5,1482 r0 bottom (schematic designator C11)
C11_3 "0.1uF" 0603 3681.5,861 r0 bottom (schematic designator C11)
C11_4 "0.1uF" 0603 3681.5,237 r0 bottom (schematic designator C11)
C12_1 "0.1uF" 0603 3682.5,2522 r0 bottom (schematic designator C12)
C12_2 "0.1uF" 0603 3682.5,1897 r0 bottom (schematic designator C12)
C12_3 "0.1uF" 0603 3682.5,1276 r0 bottom (schematic designator C12)
C12_4 "0.1uF" 0603 3682.5,652 r0 bottom (schematic designator C12)
C13_1 "0.1uF" 0603 3421.5,2107 r0 bottom (schematic designator C13)
C13_2 "0.1uF" 0603 3421.5,1482 r0 bottom (schematic designator C13)
C13_3 "0.1uF" 0603 3421.5,861 r0 bottom (schematic designator C13)
C13_4 "0.1uF" 0603 3421.5,237 r0 bottom (schematic designator C13)
C14_1 "0.1uF" 0603 3739.5,2314 r180 bottom (schematic designator C14)
C14_2 "0.1uF" 0603 3739.5,1689 r180 bottom (schematic designator C14)
C14_3 "0.1uF" 0603 3739.5,1068 r180 bottom (schematic designator C14)
C14_4 "0.1uF" 0603 3739.5,444 r180 bottom (schematic designator C14)
C15_1 "0.1uF" 0603 3612.5,2522 r180 bottom (schematic designator C15)
C15_2 "0.1uF" 0603 3612.5,1897 r180 bottom (schematic designator C15)
C15_3 "0.1uF" 0603 3612.5,1276 r180 bottom (schematic designator C15)
C15_4 "0.1uF" 0603 3612.5,652 r180 bottom (schematic designator C15)
C16_1 "0.1uF" 0603 3395,2217 r270 top (schematic designator C16)
C16_2 "0.1uF" 0603 3397,1596 r270 top (schematic designator C16)
C16_3 "0.1uF" 0603 3402,987 r270 top (schematic designator C16)
C16_4 "0.1uF" 0603 3402,396 r270 top (schematic designator C16)
C17_1 "1nF" 0603 2828,2144 r90 top (schematic designator C17)
C17_2 "1nF" 0603 2830,1523 r90 top (schematic designator C17)
C17_3 "1nF" 0603 2835,914 r90 top (schematic designator C17)
C17_4 "1nF" 0603 2835,323 r90 top (schematic designator C17)
C18_1 "0.1uF" 0603 2559,2144 r180 top (schematic designator C18)
C18_2 "0.1uF" 0603 2561,1523 r180 top (schematic designator C18)
C18_3 "0.1uF" 0603 2566,914 r180 top (schematic designator C18)
C18_4 "0.1uF" 0603 2566,323 r180 top (schematic designator C18)
C19_1 "10uF" 0603 3192,2157 r90 top (schematic designator C19)
C19_2 "10uF" 0603 3194,1536 r90 top (schematic designator C19)
C19_3 "10uF" 0603 3199,927 r90 top (schematic designator C19)
C19_4 "10uF" 0603 3199,336 r90 top (schematic designator C19)
C20_1 "1nF" 0603 2945,2310 r0 bottom (schematic designator C20)
C20_2 "1nF" 0603 2947,1689 r0 bottom (schematic designator C20)
C20_3 "1nF" 0603 2952,1080 r0 bottom (schematic designator C20)
C20_4 "1nF" 0603 2952,489 r0 bottom (schematic designator C20)
C21_1 "1nF" 0603 2408,2205 r270 top (schematic designator C21)
C21_2 "1nF" 0603 2410,1584 r270 top (schematic designator C21)
C21_3 "1nF" 0603 2415,975 r270 top (schematic designator C21)
C21_4 "1nF" 0603 2415,384 r270 top (schematic designator C21)
C22 "0.1uF" 0603 4068,526 r180 bottom
C23 "1nF" 0603 4191,600 r90 bottom
C24 "33uF" TCASE-D 4214,439 r0 top
C25 "33uF" TCASE-D 4475,1100 r180 top
C26_1 "0.1uF" 0603 1111,2644 r0 bottom (schematic designator C26)
C26_2 "0.1uF" 0603 1111,2025 r0 bottom (schematic designator C26)
C26_3 "0.1uF" 0603 1111,1400 r0 bottom (schematic designator C26)
C26_4 "0.1uF" 0603 1111,780 r0 bottom (schematic designator C26)
C27 "33uF" TCASE-D 4435,2680 r180 top
C28 "33uF" TCASE-D 4455,2010 r180 top
C29 "33uF" TCASE-D 4435,2470 r180 top
C30 "0.1uF" 0603 4379,325 r270 bottom
C31 "0.1uF" 0603 4486,600 r90 bottom
C32 "1nF" 0603 4416,600 r90 bottom
C33 "0.1uF" 0603 4486,835 r90 bottom
C34 "1nF" 0603 4416,835 r90 bottom
C35 "0.1uF" 0603 4560,2320 r270 bottom
C36 "1nF" 0603 4578,2004 r270 bottom
C37 "0.1uF" 0603 4264,2725 r0 bottom
C38 "1nF" 0603 4264,2795 r0 bottom
C39_1 "0.1uF" 0603 2945,2380 r0 bottom (schematic designator C39)
C39_2 "0.1uF" 0603 2947,1759 r0 bottom (schematic designator C39)
C39_3 "0.1uF" 0603 2952,1150 r0 bottom (schematic designator C39)
C39_4 "0.1uF" 0603 2952,559 r0 bottom (schematic designator C39)
C40_1 "5pF" 0603 1773,2521 r270 top (schematic designator C40)
C40_2 "5pF" 0603 1772,1908 r270 top (schematic designator C40)
C40_3 "5pF" 0603 1772,1283 r270 top (schematic designator C40)
C40_4 "5pF" 0603 1771,664 r270 top (schematic designator C40)
C41_1 "0.1uF" 0603 1932,2470 r270 bottom (schematic designator C41)
C41_2 "0.1uF" 0603 1929,1851 r270 bottom (schematic designator C41)
C41_3 "0.1uF" 0603 1929,1225 r270 bottom (schematic designator C41)
C41_4 "0.1uF" 0603 1925,604 r270 bottom (schematic designator C41)
C42_1 "1nF" 0603 2000,2470 r270 bottom (schematic designator C42)
C42_2 "1nF" 0603 1997,1851 r270 bottom (schematic designator C42)
C42_3 "1nF" 0603 1996,1225 r270 bottom (schematic designator C42)
C42_4 "1nF" 0603 1994,605 r270 bottom (schematic designator C42)
C43_1 "5pF" 0603 2165,2310 r270 top (schematic designator C43)
C43_2 "5pF" 0603 2165,1690 r270 top (schematic designator C43)
C43_3 "5pF" 0603 2165,1065 r270 top (schematic designator C43)
C43_4 "5pF" 0603 2165,445 r270 top (schematic designator C43)
C44 "1nF" 0603 4566,1330 r180 bottom
C45_1 "0.1uF" 0603 3392,2421 r90 top (schematic designator C45)
C45_2 "0.1uF" 0603 3394,1800 r90 top (schematic designator C45)
C45_3 "0.1uF" 0603 3399,1191 r90 top (schematic designator C45)
C45_4 "0.1uF" 0603 3399,600 r90 top (schematic designator C45)
C46_1 "0.1uF" 0603 3422.5,2522 r0 bottom (schematic designator C46)
C46_2 "0.1uF" 0603 3422.5,1897 r0 bottom (schematic designator C46)
C46_3 "0.1uF" 0603 3422.5,1276 r0 bottom (schematic designator C46)
C46_4 "0.1uF" 0603 3420.5,674 r0 bottom (schematic designator C46)
C47_1 "1nF" 0603 2888,2541 r180 top (schematic designator C47)
C47_2 "1nF" 0603 2890,1920 r180 top (schematic designator C47)
C47_3 "1nF" 0603 2895,1311 r180 top (schematic designator C47)
C47_4 "1nF" 0603 2895,720 r180 top (schematic designator C47)
C48_1 "10uF" 0603 3191,2481 r270 top (schematic designator C48)
C48_2 "10uF" 0603 3193,1860 r270 top (schematic designator C48)
C48_3 "10uF" 0603 3198,1251 r270 top (schematic designator C48)
C48_4 "10uF" 0603 3198,660 r270 top (schematic designator C48)
C49_1 "0.1uF" 0603 3611.5,2107 r180 bottom (schematic designator C49)
C49_2 "0.1uF" 0603 3611.5,1482 r180 bottom (schematic designator C49)
C49_3 "0.1uF" 0603 3611.5,861 r180 bottom (schematic designator C49)
C49_4 "0.1uF" 0603 3611.5,237 r180 bottom (schematic designator C49)
C50_1 "0.1uF" 0603 3609.5,2314 r180 bottom (schematic designator C50)
C50_2 "0.1uF" 0603 3609.5,1689 r180 bottom (schematic designator C50)
C50_3 "0.1uF" 0603 3609.5,1068 r180 bottom (schematic designator C50)
C50_4 "0.1uF" 0603 3609.5,444 r180 bottom (schematic designator C50)
C51_1 "0.1uF" 0603 3419.5,2314 r0 bottom (schematic designator C51)
C51_2 "0.1uF" 0603 3419.5,1689 r0 bottom (schematic designator C51)
C51_3 "0.1uF" 0603 3419.5,1068 r0 bottom (schematic designator C51)
C51_4 "0.1uF" 0603 3419.5,444 r0 bottom (schematic designator C51)
C52_1 "DNL" 0603 2408,2287 r90 top (schematic designator C52)
C52_2 "DNL" 0603 2410,1666 r90 top (schematic designator C52)
C52_3 "DNL" 0603 2415,1057 r90 top (schematic designator C52)
C52_4 "DNL" 0603 2415,466 r90 top (schematic designator C52)
C53_1 "0.1uF" 0603 2508,2600 r0 top (schematic designator C53)
C53_2 "0.1uF" 0603 2510,1979 r0 top (schematic designator C53)
C53_3 "0.1uF" 0603 2515,1370 r0 top (schematic designator C53)
C53_4 "0.1uF" 0603 2513,780 r0 top (schematic designator C53)
C54_1 "0.1uF" 0603 2700,2400 r90 top (schematic designator C54)
C54_2 "0.1uF" 0603 2702,1779 r90 top (schematic designator C54)
C54_3 "0.1uF" 0603 2707,1170 r90 top (schematic designator C54)
C54_4 "0.1uF" 0603 2707,579 r90 top (schematic designator C54)
C55 "10uF" 0603 4161,241 r0 top
C56 "10uF" 0603 4102,778 r90 top
C57 "0.1uF" 0603 4090,1065 r90 top
C58_1 "0.1uF" 0603 1301,2400 r270 bottom (schematic designator C58)
C58_2 "0.1uF" 0603 1301,1780 r270 bottom (schematic designator C58)
C58_3 "0.1uF" 0603 1301,1155 r270 bottom (schematic designator C58)
C58_4 "0.1uF" 0603 1301,535 r270 bottom (schematic designator C58)
C59_1 "0.1uF" 0603 1131,2540 r180 bottom (schematic designator C59)
C59_2 "0.1uF" 0603 1131,1920 r180 bottom (schematic designator C59)
C59_3 "0.1uF" 0603 1131,1295 r180 bottom (schematic designator C59)
C59_4 "0.1uF" 0603 1131,675 r180 bottom (schematic designator C59)
C60_1 "0.1uF" 0603 3263,2576 r0 top (schematic designator C60)
C60_2 "0.1uF" 0603 3265,1955 r0 top (schematic designator C60)
C60_3 "0.1uF" 0603 3270,1346 r0 top (schematic designator C60)
C60_4 "0.1uF" 0603 3270,755 r0 top (schematic designator C60)
C61_1 "0.1uF" 0603 1471,2180 r180 bottom (schematic designator C61)
C61_2 "0.1uF" 0603 1620,1648 r180 bottom (schematic designator C61)
C61_3 "0.1uF" 0603 1627,930 r0 bottom (schematic designator C61)
C61_4 "0.1uF" 0603 1624,321 r0 bottom (schematic designator C61)
C62_1 "0.1uF" 0603 1458,2246 r180 bottom (schematic designator C62)
C62_2 "0.1uF" 0603 1460,1556 r90 bottom (schematic designator C62)
C62_3 "0.1uF" 0603 1457,930 r90 bottom (schematic designator C62)
C62_4 "0.1uF" 0603 1456,320 r90 bottom (schematic designator C62)
C63_1 "10uF, 1210" CC3225-1210 1517,2658 r90 bottom (schematic designator C63)
C63_2 "10uF, 1210" CC3225-1210 1519,2039 r90 bottom (schematic designator C63)
C63_3 "10uF, 1210" CC3225-1210 1514,1403 r90 bottom (schematic designator C63)
C63_4 "10uF, 1210" CC3225-1210 1514,790 r90 bottom (schematic designator C63)
C64_1 "10uF, 1210" CC3225-1210 2010,2321 r180 bottom (schematic designator C64)
C64_2 "10uF, 1210" CC3225-1210 2007,1695 r180 bottom (schematic designator C64)
C64_3 "10uF, 1210" CC3225-1210 2005,1074 r180 bottom (schematic designator C64)
C64_4 "10uF, 1210" CC3225-1210 2001,452 r180 bottom (schematic designator C64)
C65_1 "10uF, 1210" CC3225-1210 2971,2505 r0 bottom (schematic designator C65)
C65_2 "10uF, 1210" CC3225-1210 2971,1880 r0 bottom (schematic designator C65)
C65_3 "10uF, 1210" CC3225-1210 2964,1275 r0 bottom (schematic designator C65)
C65_4 "10uF, 1210" CC3225-1210 2968,685 r0 bottom (schematic designator C65)
C66_1 "10uF, 1210" CC3225-1210 2666,2402 r270 bottom (schematic designator C66)
C66_2 "10uF, 1210" CC3225-1210 2668,1784 r270 bottom (schematic designator C66)
C66_3 "10uF, 1210" CC3225-1210 2661,1173 r270 bottom (schematic designator C66)
C66_4 "10uF, 1210" CC3225-1210 2664,581 r270 bottom (schematic designator C66)
C67_1 "1nF" 0603 3733,2516 r180 top (schematic designator C67)
C67_2 "1nF" 0603 3739,1897 r180 top (schematic designator C67)
C67_3 "1nF" 0603 3739,1270 r180 top (schematic designator C67)
C67_4 "1nF" 0603 3735,646 r180 top (schematic designator C67)
C68_1 "1nF" 0603 3773,2266 r180 top (schematic designator C68)
C68_2 "1nF" 0603 3776,1639 r180 top (schematic designator C68)
C68_3 "1nF" 0603 3777,1020 r180 top (schematic designator C68)
C68_4 "1nF" 0603 3777,394 r180 top (schematic designator C68)
C69_1 "1nF" 0603 3773,2356 r180 top (schematic designator C69)
C69_2 "1nF" 0603 3776,1725 r180 top (schematic designator C69)
C69_3 "1nF" 0603 3777,1108 r180 top (schematic designator C69)
C69_4 "1nF" 0603 3777,478 r180 top (schematic designator C69)
CS0 "TestPoint" TP-3520-SK 4079,1807 r270 bottom
CS1 "TestPoint" TP-3520-SK 4090,1872 r270 bottom
CS7 "TestPoint" TP-3520-SK 4056,2160 r270 bottom
CS8 "TestPoint" TP-3520-SK 4056,2230 r90 bottom
CS9 "TestPoint" TP-3520-SK 4056,2295 r270 bottom
DEV_SCK "TestPoint" TP-3520-SK 4014,2768 r180 bottom
DP1 "LED, 0805, Yellow" 0805L 4555,2557 r90 top
FM1 "Fiducial" Fiducial_mark 3481,2879 r0 top
FM2 "Fiducial" Fiducial_mark 4918,61 r0 top
FM3 "Fiducial" Fiducial_mark 865,60 r0 top
J1 "DB37F_Resize" "DSUB37-F (590MILS)" 274,1146 r90 top
J2 "DB37M_Resize" "DSUB37-M (590MILS)" 5493,1798 r270 top
J4 "WM2889" HDR1X3_MolexVertical 4553,217 r0 top
L1_1 "Inductance" 0603 3327,2157 r90 top (schematic designator L1)
L1_2 "Inductance" 0603 3329,1536 r90 top (schematic designator L1)
L1_3 "Inductance" 0603 3334,927 r90 top (schematic designator L1)
L1_4 "Inductance" 0603 3334,336 r90 top (schematic designator L1)
L2_1 "Transformer" TTWB 4646,2400 r270 top (schematic designator L2)
L2_2 "Transformer" TTWB 4646,1780 r270 top (schematic designator L2)
L2_3 "Transformer" TTWB 4646,1155 r270 top (schematic designator L2)
L2_4 "Transformer" TTWB 4646,535 r270 top (schematic designator L2)
L3 "ELL-ATV330M" ELLATV 4373,770 r0 top
L4 "10uH" 0805 4303,241 r0 top
L5 "22uH" SRR4028 4205,2240 r180 top
L6 "22uH" SRR4028 4430,2240 r180 top
L7_1 "10uH" 0805 2637,2624 r0 top (schematic designator L7)
L7_2 "10uH" 0805 2639,2003 r0 top (schematic designator L7)
L7_3 "10uH" 0805 2644,1394 r0 top (schematic designator L7)
L7_4 "10uH" 0805 2729,780 r270 top (schematic designator L7)
L8_1 "10uH" 0805 2707,2539 r180 top (schematic designator L8)
L8_2 "10uH" 0805 2709,1918 r180 top (schematic designator L8)
L8_3 "10uH" 0805 2714,1309 r180 top (schematic designator L8)
L8_4 "10uH" 0805 2653,780 r270 top (schematic designator L8)
L9_1 "Inductance" 0603 3325,2481 r270 top (schematic designator L9)
L9_2 "Inductance" 0603 3327,1860 r270 top (schematic designator L9)
L9_3 "Inductance" 0603 3332,1251 r270 top (schematic designator L9)
L9_4 "Inductance" 0603 3332,660 r270 top (schematic designator L9)
L11_1 "DNL" TTWB 4644,2695 r270 top (schematic designator L11)
L11_2 "DNL" TTWB 4644,2075 r270 top (schematic designator L11)
L11_3 "DNL" TTWB 4644,1450 r270 top (schematic designator L11)
L11_4 "DNL" TTWB 4644,830 r270 top (schematic designator L11)
LR "TestPoint" TP-3520-SK 4130,979 r270 bottom
LRCap "TestPoint" TP-3520-SK 4197,779 r180 bottom
MOSI "TestPoint" TP-3520-SK 4071,1505 r180 bottom
Q1_1 "MMBT2222A" SOT23 1233,2368.5 r90 bottom (schematic designator Q1)
Q1_2 "MMBT2222A" SOT23 1227,1748 r90 bottom (schematic designator Q1)
Q1_3 "MMBT2222A" SOT23 1228,1124 r90 bottom (schematic designator Q1)
Q1_4 "MMBT2222A" SOT23 1227,503.5 r90 bottom (schematic designator Q1)
R1_1 "20, 0805" 0805 1051,2360 r0 top (schematic designator R1)
R1_2 "20, 0805" 0805 1051,1740 r0 top (schematic designator R1)
R1_3 "20, 0805" 0805 1051,1115 r0 top (schematic designator R1)
R1_4 "20, 0805" 0805 1051,496 r0 top (schematic designator R1)
R2_1 "20, 0805" 0805 1329,2367 r180 top (schematic designator R2)
R2_2 "20, 0805" 0805 1330,1752 r180 top (schematic designator R2)
R2_3 "20, 0805" 0805 1329,1122 r180 top (schematic designator R2)
R2_4 "20, 0805" 0805 1329,504 r180 top (schematic designator R2)
R3_1 "DNL" 0805 1191,2355 r270 top (schematic designator R3)
R3_2 "DNL" 0805 1191,1735 r270 top (schematic designator R3)
R3_3 "DNL" 0805 1191,1110 r270 top (schematic designator R3)
R3_4 "DNL" 0805 1191,490 r270 top (schematic designator R3)
R4_1 "DNL, 1206" 1206 4947,2350 r270 top (schematic designator R4)
R4_2 "DNL, 1206" 1206 4947,1740 r270 top (schematic designator R4)
R4_3 "DNL, 1206" 1206 4947,1105 r270 top (schematic designator R4)
R4_4 "DNL, 1206" 1206 4947,490 r270 top (schematic designator R4)
R5_1 "20, 0805" 0805 1051,2285 r0 top (schematic designator R5)
R5_2 "20, 0805" 0805 1051,1665 r0 top (schematic designator R5)
R5_3 "20, 0805" 0805 1051,1040 r0 top (schematic designator R5)
R5_4 "20, 0805" 0805 1051,420 r0 top (schematic designator R5)
R6_1 "1k" 0603 1148,2231 r0 bottom (schematic designator R6)
R6_2 "1k" 0603 1148,1606 r0 bottom (schematic designator R6)
R6_3 "1k" 0603 1147,979 r0 bottom (schematic designator R6)
R6_4 "1k" 0603 1148,363 r0 bottom (schematic designator R6)
R7_1 "10" 0603 1071,2470 r0 bottom (schematic designator R7)
R7_2 "10" 0603 1071,1850 r0 bottom (schematic designator R7)
R7_3 "10" 0603 1071,1225 r0 bottom (schematic designator R7)
R7_4 "10" 0603 1071,605 r0 bottom (schematic designator R7)
R8_1 "11k" 0603 3029,2146 r0 top (schematic designator R8)
R8_2 "11k" 0603 3031,1525 r0 top (schematic designator R8)
R8_3 "11k" 0603 3036,916 r0 top (schematic designator R8)
R8_4 "11k" 0603 3036,325 r0 top (schematic designator R8)
R9_1 "12k" 0603 2958,2146 r180 top (schematic designator R9)
R9_2 "12k" 0603 2960,1525 r180 top (schematic designator R9)
R9_3 "12k" 0603 2965,916 r180 top (schematic designator R9)
R9_4 "12k" 0603 2965,325 r180 top (schematic designator R9)
R10_1 "20, 0805" 0805 1329,2290 r180 top (schematic designator R10)
R10_2 "20, 0805" 0805 1330,1676 r180 top (schematic designator R10)
R10_3 "20, 0805" 0805 1329,1047 r180 top (schematic designator R10)
R10_4 "20, 0805" 0805 1329,428 r180 top (schematic designator R10)
R11_1 "0" 0603 4790,2710 r180 bottom (schematic designator R11)
R11_2 "0" 0603 4790,2090 r180 bottom (schematic designator R11)
R11_3 "0" 0603 4790,1465 r180 bottom (schematic designator R11)
R11_4 "0" 0603 4790,845 r180 bottom (schematic designator R11)
R12_1 "DNL" 0603 3259,2157 r90 top (schematic designator R12)
R12_2 "DNL" 0603 3261,1536 r90 top (schematic designator R12)
R12_3 "DNL" 0603 3266,927 r90 top (schematic designator R12)
R12_4 "DNL" 0603 3266,336 r90 top (schematic designator R12)
R13_1 "0" 0603 3192,2286 r0 top (schematic designator R13)
R13_2 "0" 0603 3194,1665 r0 top (schematic designator R13)
R13_3 "0" 0603 3199,1056 r0 top (schematic designator R13)
R13_4 "0" 0603 3199,465 r0 top (schematic designator R13)
R14_1 "4.99" 0603 3123,2278 r270 top (schematic designator R14)
R14_2 "4.99" 0603 3125,1657 r270 top (schematic designator R14)
R14_3 "4.99" 0603 3130,1048 r270 top (schematic designator R14)
R14_4 "4.99" 0603 3130,457 r270 top (schematic designator R14)
R15 "10k" 0603 4271,750 r0 bottom
R16 "0" 0603 3950,2600 r0 bottom
R17 "0" 0603 4848,218 r0 bottom
R18 "DNL" 0603 5298,597 r90 bottom
R19_1 "750" 0603 1111,2578 r180 top (schematic designator R19)
R19_2 "750" 0603 1111,1957 r180 top (schematic designator R19)
R19_3 "750" 0603 1111,1332 r180 top (schematic designator R19)
R19_4 "750" 0603 1111,712 r180 top (schematic designator R19)
R20_1 "750" 0603 1251,2585 r0 top (schematic designator R20)
R20_2 "750" 0603 1251,1965 r0 top (schematic designator R20)
R20_3 "750" 0603 1251,1340 r0 top (schematic designator R20)
R20_4 "750" 0603 1251,720 r0 top (schematic designator R20)
R21_1 "DNL" 0603 1181,2576 r270 top (schematic designator R21)
R21_2 "DNL" 0603 1181,1954 r270 top (schematic designator R21)
R21_3 "DNL" 0603 1181,1325 r270 top (schematic designator R21)
R21_4 "DNL" 0603 1181,709 r270 top (schematic designator R21)
R22_1 "4.99k" 0603 3552.5,2652 r270 bottom (schematic designator R22)
R22_2 "4.99k" 0603 3552.5,2027 r270 bottom (schematic designator R22)
R22_3 "4.99k" 0603 3552.5,1406 r270 bottom (schematic designator R22)
R22_4 "4.99k" 0603 3552.5,782 r270 bottom (schematic designator R22)
R23_1 "4.99k" 0603 3482.5,2592 r180 bottom (schematic designator R23)
R23_2 "4.99k" 0603 3482.5,1967 r180 bottom (schematic designator R23)
R23_3 "4.99k" 0603 3482.5,1346 r180 bottom (schematic designator R23)
R23_4 "4.99k" 0603 3480.5,744 r180 bottom (schematic designator R23)
R24_1 "2k" 0603 3458.5,2245 r180 bottom (schematic designator R24)
R24_2 "2k" 0603 3458.5,1620 r180 bottom (schematic designator R24)
R24_3 "2k" 0603 3458.5,999 r180 bottom (schematic designator R24)
R24_4 "2k" 0603 3458.5,375 r180 bottom (schematic designator R24)
R25_1 "2k" 0603 3560.5,2238 r270 bottom (schematic designator R25)
R25_2 "2k" 0603 3560.5,1613 r270 bottom (schematic designator R25)
R25_3 "2k" 0603 3560.5,992 r270 bottom (schematic designator R25)
R25_4 "2k" 0603 3560.5,368 r270 bottom (schematic designator R25)
R26_1 "200" 0603 3549.5,2444 r270 bottom (schematic designator R26)
R26_2 "200" 0603 3549.5,1819 r270 bottom (schematic designator R26)
R26_3 "200" 0603 3549.5,1198 r270 bottom (schematic designator R26)
R26_4 "200" 0603 3549.5,574 r270 bottom (schematic designator R26)
R27_1 "100" 0603 3479.5,2384 r180 bottom (schematic designator R27)
R27_2 "100" 0603 3479.5,1759 r180 bottom (schematic designator R27)
R27_3 "100" 0603 3479.5,1138 r180 bottom (schematic designator R27)
R27_4 "100" 0603 3479.5,514 r180 bottom (schematic designator R27)
R28 "DNL" 0603 3950,2680 r0 bottom
R29 "0" 0603 4734,1559 r180 bottom
R30 "DNL" 0603 3950,2460 r0 bottom
R31 "0" 0603 3950,2530 r0 bottom
R32 "10k" 0603 4271,980 r0 bottom
R33 "DNL" 0603 4654,1675 r90 bottom
R34 "0" 0603 4654,1831 r180 bottom
R35_1 "100, 1206" 1206 4947,2645 r270 top (schematic designator R35)
R35_2 "100, 1206" 1206 4947,2023 r270 top (schematic designator R35)
R35_3 "100, 1206" 1206 4947,1395 r270 top (schematic designator R35)
R35_4 "100, 1206" 1206 4947,785 r270 top (schematic designator R35)
R36_1 "750" 0603 1111,2503 r180 top (schematic designator R36)
R36_2 "750" 0603 1111,1882 r180 top (schematic designator R36)
R36_3 "750" 0603 1111,1257 r180 top (schematic designator R36)
R36_4 "750" 0603 1111,637 r180 top (schematic designator R36)
R37_1 "750" 0603 1251,2500 r0 top (schematic designator R37)
R37_2 "750" 0603 1251,1880 r0 top (schematic designator R37)
R37_3 "750" 0603 1251,1255 r0 top (schematic designator R37)
R37_4 "750" 0603 1251,635 r0 top (schematic designator R37)
R38_1 "20k" 0603 1111,2645 r180 top (schematic designator R38)
R38_2 "20k" 0603 1111,2025 r180 top (schematic designator R38)
R38_3 "20k" 0603 1111,1400 r180 top (schematic designator R38)
R38_4 "20k" 0603 1111,780 r180 top (schematic designator R38)
R39_1 "0" 0603 4790,2485 r180 bottom (schematic designator R39)
R39_2 "0" 0603 4790,1865 r180 bottom (schematic designator R39)
R39_3 "0" 0603 4790,1240 r180 bottom (schematic designator R39)
R39_4 "0" 0603 4790,620 r180 bottom (schematic designator R39)
R40_1 "0" 0603 3065,2595 r270 top (schematic designator R40)
R40_2 "0" 0603 3067,1974 r270 top (schematic designator R40)
R40_3 "0" 0603 3072,1365 r270 top (schematic designator R40)
R40_4 "0" 0603 3072,774 r270 top (schematic designator R40)
R41_1 "1k" 0603 3456.5,2177 r180 bottom (schematic designator R41)
R41_2 "1k" 0603 3456.5,1552 r180 bottom (schematic designator R41)
R41_3 "1k" 0603 3456.5,931 r180 bottom (schematic designator R41)
R41_4 "1k" 0603 3456.5,307 r180 bottom (schematic designator R41)
R42 "0" 0603 868,2803 r180 top
R43_1 "DNL" 0603 2969,2537 r90 top (schematic designator R43)
R43_2 "DNL" 0603 2971,1916 r90 top (schematic designator R43)
R43_3 "DNL" 0603 2976,1307 r90 top (schematic designator R43)
R43_4 "DNL" 0603 2976,716 r90 top (schematic designator R43)
R44_1 "DNL" 0603 3258,2481 r270 top (schematic designator R44)
R44_2 "DNL" 0603 3260,1860 r270 top (schematic designator R44)
R44_3 "DNL" 0603 3265,1251 r270 top (schematic designator R44)
R44_4 "DNL" 0603 3265,660 r270 top (schematic designator R44)
R45_1 "0" 0603 3192,2353 r0 top (schematic designator R45)
R45_2 "0" 0603 3194,1732 r0 top (schematic designator R45)
R45_3 "0" 0603 3199,1123 r0 top (schematic designator R45)
R45_4 "0" 0603 3199,532 r0 top (schematic designator R45)
R46_1 "DNL" 0603 2408,2423 r180 top (schematic designator R46)
R46_2 "DNL" 0603 2410,1802 r180 top (schematic designator R46)
R46_3 "DNL" 0603 2415,1193 r180 top (schematic designator R46)
R46_4 "DNL" 0603 2417,598 r180 top (schematic designator R46)
R47_1 "DNL" 0603 2693,2143 r180 top (schematic designator R47)
R47_2 "DNL" 0603 2695,1522 r180 top (schematic designator R47)
R47_3 "DNL" 0603 2700,913 r180 top (schematic designator R47)
R47_4 "DNL" 0603 2700,322 r180 top (schematic designator R47)
R48_1 "0" 0603 1111,2434 r180 top (schematic designator R48)
R48_2 "0" 0603 1111,1814 r180 top (schematic designator R48)
R48_3 "0" 0603 1111,1190 r180 top (schematic designator R48)
R48_4 "0" 0603 1111,570 r180 top (schematic designator R48)
R49_1 "4.99" 0603 3123,2352 r90 top (schematic designator R49)
R49_2 "4.99" 0603 3125,1731 r90 top (schematic designator R49)
R49_3 "4.99" 0603 3130,1122 r90 top (schematic designator R49)
R49_4 "4.99" 0603 3130,531 r90 top (schematic designator R49)
R50_1 "402" 0603 2235,2560 r90 top (schematic designator R50)
R50_2 "402" 0603 2235,1940 r90 top (schematic designator R50)
R50_3 "402" 0603 2235,1315 r90 top (schematic designator R50)
R50_4 "402" 0603 2235,695 r90 top (schematic designator R50)
R51_1 "4.22k" 0603 1622,2223 r90 top (schematic designator R51)
R51_2 "4.22k" 0603 1622,1603 r90 top (schematic designator R51)
R51_3 "4.22k" 0603 1622,978 r90 top (schematic designator R51)
R51_4 "4.22k" 0603 1622,358 r90 top (schematic designator R51)
R52_1 "0" 0603 1845,2245 r0 top (schematic designator R52)
R52_2 "0" 0603 1845,1625 r0 top (schematic designator R52)
R52_3 "0" 0603 1845,1000 r0 top (schematic designator R52)
R52_4 "0" 0603 1845,380 r0 top (schematic designator R52)
R53_1 "4.99" 0603 1480,2449 r180 top (schematic designator R53)
R53_2 "4.99" 0603 1481,1821 r180 top (schematic designator R53)
R53_3 "4.99" 0603 1481,1192 r180 top (schematic designator R53)
R53_4 "4.99" 0603 1482,585 r180 top (schematic designator R53)
R54_1 "100" 0603 1860,2635 r180 top (schematic designator R54)
R54_2 "100" 0603 1860,2015 r180 top (schematic designator R54)
R54_3 "100" 0603 1860,1390 r180 top (schematic designator R54)
R54_4 "100" 0603 1860,770 r180 top (schematic designator R54)
R55_1 "49.9, 0805" 0805 2165,2480 r0 top (schematic designator R55)
R55_2 "49.9, 0805" 0805 2165,1860 r0 top (schematic designator R55)
R55_3 "49.9, 0805" 0805 2165,1235 r0 top (schematic designator R55)
R55_4 "49.9, 0805" 0805 2165,615 r0 top (schematic designator R55)
R56_1 "100" 0603 1845,2375 r270 top (schematic designator R56)
R56_2 "100" 0603 1845,1755 r270 top (schematic designator R56)
R56_3 "100" 0603 1845,1130 r270 top (schematic designator R56)
R56_4 "100" 0603 1845,510 r270 top (schematic designator R56)
R57_1 "49.9, 0805" 0805 2165,2390 r0 top (schematic designator R57)
R57_2 "49.9, 0805" 0805 2165,1770 r0 top (schematic designator R57)
R57_3 "49.9, 0805" 0805 2165,1145 r0 top (schematic designator R57)
R57_4 "49.9, 0805" 0805 2165,525 r0 top (schematic designator R57)
R58_1 "75" 0603 1840,2520 r270 top (schematic designator R58)
R58_2 "75" 0603 1839,1908 r270 top (schematic designator R58)
R58_3 "75" 0603 1842,1283 r270 top (schematic designator R58)
R58_4 "75" 0603 1841,664 r270 top (schematic designator R58)
R59_1 "100" 0603 1557,2223 r90 top (schematic designator R59)
R59_2 "100" 0603 1557,1603 r90 top (schematic designator R59)
R59_3 "100" 0603 1557,978 r90 top (schematic designator R59)
R59_4 "100" 0603 1557,358 r90 top (schematic designator R59)
R60_1 "402" 0603 2245,2310 r270 top (schematic designator R60)
R60_2 "402" 0603 2245,1690 r270 top (schematic designator R60)
R60_3 "402" 0603 2245,1065 r270 top (schematic designator R60)
R60_4 "402" 0603 2245,445 r270 top (schematic designator R60)
R61 "10k" 0603 4513,1100 r270 bottom
R62 "DNL" 0603 4580,1101 r270 bottom
R63_1 "0" 0603 1276,2480 r90 bottom (schematic designator R63)
R63_2 "0" 0603 1276,1860 r90 bottom (schematic designator R63)
R63_3 "0" 0603 1276,1235 r90 bottom (schematic designator R63)
R63_4 "0" 0603 1276,615 r90 bottom (schematic designator R63)
R64_1 "DNL" 0603 2567,2531 r180 top (schematic designator R64)
R64_2 "DNL" 0603 2569,1910 r180 top (schematic designator R64)
R64_3 "DNL" 0603 2574,1301 r180 top (schematic designator R64)
R64_4 "DNL" 0603 2574,710 r180 top (schematic designator R64)
R65_1 "DNL" 0603 2700,2269 r90 top (schematic designator R65)
R65_2 "DNL" 0603 2702,1648 r90 top (schematic designator R65)
R65_3 "DNL" 0603 2707,1039 r90 top (schematic designator R65)
R65_4 "DNL" 0603 2707,448 r90 top (schematic designator R65)
R66 "0" 0603 4886,2804 r0 top
R67 "4.99k" 0603 4212,421 r0 bottom
R68 "499k" 0603 4016,1065 r90 top
R69_1 "5.76k" 0603 2828,2272 r90 top (schematic designator R69)
R69_2 "5.76k" 0603 2830,1651 r90 top (schematic designator R69)
R69_3 "5.76k" 0603 2835,1042 r90 top (schematic designator R69)
R69_4 "5.76k" 0603 2835,451 r90 top (schematic designator R69)
R70_1 "5.76k" 0603 2829,2462 r270 top (schematic designator R70)
R70_2 "5.76k" 0603 2831,1841 r270 top (schematic designator R70)
R70_3 "5.76k" 0603 2836,1232 r270 top (schematic designator R70)
R70_4 "5.76k" 0603 2836,641 r270 top (schematic designator R70)
R71_1 "DNL" 0603 2090,2635 r180 top (schematic designator R71)
R71_2 "DNL" 0603 2090,2015 r180 top (schematic designator R71)
R71_3 "DNL" 0603 2090,1390 r180 top (schematic designator R71)
R71_4 "DNL" 0603 2090,770 r180 top (schematic designator R71)
R72_1 "DNL" 0603 1750,2285 r180 top (schematic designator R72)
R72_2 "DNL" 0603 1750,1665 r180 top (schematic designator R72)
R72_3 "DNL" 0603 1750,1040 r180 top (schematic designator R72)
R72_4 "DNL" 0603 1750,420 r180 top (schematic designator R72)
R73 "0" 0603 825,365 r270 top
R74 "DNL" 0603 4560,1755 r270 bottom
R75 "100" 0603 4561,1455 r90 bottom
R76 "100" 0603 4166,1370 r90 bottom
R77_1 "DNL" 0603 4790,2360 r180 bottom (schematic designator R77)
R77_2 "DNL" 0603 4790,1740 r180 bottom (schematic designator R77)
R77_3 "DNL" 0603 4790,1115 r180 bottom (schematic designator R77)
R77_4 "DNL" 0603 4790,495 r180 bottom (schematic designator R77)
R78_1 "DNL" 0603 4790,2255 r180 bottom (schematic designator R78)
R78_2 "DNL" 0603 4790,1635 r180 bottom (schematic designator R78)
R78_3 "DNL" 0603 4790,1010 r180 bottom (schematic designator R78)
R78_4 "DNL" 0603 4790,390 r180 bottom (schematic designator R78)
R79_1 "DNL" 0603 4790,2640 r180 bottom (schematic designator R79)
R79_2 "DNL" 0603 4790,2022 r180 bottom (schematic designator R79)
R79_3 "DNL" 0603 4790,1395 r180 bottom (schematic designator R79)
R79_4 "DNL" 0603 4790,775 r180 bottom (schematic designator R79)
R80_1 "DNL" 0603 4790,2560 r180 bottom (schematic designator R80)
R80_2 "DNL" 0603 4790,1932 r180 bottom (schematic designator R80)
R80_3 "DNL" 0603 4790,1315 r180 bottom (schematic designator R80)
R80_4 "DNL" 0603 4790,695 r180 bottom (schematic designator R80)
R81_1 "DNL" 0603 1450,2180 r180 top (schematic designator R81)
R81_2 "DNL" 0603 1450,1560 r180 top (schematic designator R81)
R81_3 "DNL" 0603 1450,935 r180 top (schematic designator R81)
R81_4 "DNL" 0603 1453,315 r180 top (schematic designator R81)
R82_1 "DNL" 0603 1390,2245 r0 top (schematic designator R82)
R82_2 "DNL" 0603 1390,1625 r0 top (schematic designator R82)
R82_3 "DNL" 0603 1390,1000 r0 top (schematic designator R82)
R82_4 "DNL" 0603 1393,380 r0 top (schematic designator R82)
R83 "DNL" 0603 5307,1097 r270 bottom
R84 "DNL" 0603 5376,1098 r270 bottom
R85 "2k" 0603 4555,2707 r90 top
REG_DEV_MOSI "TestPoint" TP-3520-SK 4077,2544 r180 bottom
REG_DEV_SCK "TestPoint" TP-3520-SK 4075,2638 r180 bottom
REG_SCK "TestPoint" TP-3520-SK 4580,2140 r180 bottom
SH1 "LeaderTech 20S-CBS-2x0.5x0.2 - DIVIDE QUANITY REQURIED BY 10!" "SHIELD BASE CORNER" 1055,215 r180 top locked
SH2 "LeaderTech 20S-CBS-2x0.5x0.2 - DIVIDE QUANITY REQURIED BY 10!" "SHIELD BASE" 1555,215 r180 top locked
SH3 "LeaderTech 20S-CBS-2x0.5x0.2 - DIVIDE QUANITY REQURIED BY 10!" "SHIELD BASE" 2055,215 r180 top locked
SH4 "LeaderTech 20S-CBS-2x0.5x0.2 - DIVIDE QUANITY REQURIED BY 10!" "SHIELD BASE" 2555,215 r180 top locked
SH5 "LeaderTech 20S-CBS-2x0.5x0.2 - DIVIDE QUANITY REQURIED BY 10!" "SHIELD BASE" 3055,215 r180 top locked
SH6 "LeaderTech 20S-CBS-2x0.5x0.2 - DIVIDE QUANITY REQURIED BY 10!" "SHIELD BASE" 3555,215 r180 top locked
SH8 "LeaderTech 20S-CBS-2x0.5x0.2 - DIVIDE QUANITY REQURIED BY 10!" "SHIELD BASE CORNER" 3936,346 r270 top locked
SH9 "LeaderTech 20S-CBS-2x0.5x0.2 - DIVIDE QUANITY REQURIED BY 10!" "SHIELD BASE" 3936,846 r270 top locked
SH10 "LeaderTech 20S-CBS-2x0.5x0.2 - DIVIDE QUANITY REQURIED BY 10!" "SHIELD BASE" 3936,1346 r270 top locked
SH11 "LeaderTech 20S-CBS-2x0.5x0.2 - DIVIDE QUANITY REQURIED BY 10!" "SHIELD BASE" 3936,1846 r270 top locked
SH12 "LeaderTech 20S-CBS-2x0.5x0.2 - DIVIDE QUANITY REQURIED BY 10!" "SHIELD BASE" 3936,2346 r270 top locked
SH13 "LeaderTech 20S-CBS-2x0.5x0.2 - DIVIDE QUANITY REQURIED BY 10!" "SHIELD BASE CORNER" 3805,2727 r0 top locked
SH14 "LeaderTech 20S-CBS-2x0.5x0.2 - DIVIDE QUANITY REQURIED BY 10!" "SHIELD BASE" 3305,2727 r0 top locked
SH16 "LeaderTech 20S-CBS-2x0.5x0.2 - DIVIDE QUANITY REQURIED BY 10!" "SHIELD BASE" 2805,2727 r0 top locked
SH17 "LeaderTech 20S-CBS-2x0.5x0.2 - DIVIDE QUANITY REQURIED BY 10!" "SHIELD BASE" 2305,2727 r0 top locked
SH18 "LeaderTech 20S-CBS-2x0.5x0.2 - DIVIDE QUANITY REQURIED BY 10!" "SHIELD BASE" 1805,2727 r0 top locked
SH19 "LeaderTech 20S-CBS-2x0.5x0.2 - DIVIDE QUANITY REQURIED BY 10!" "SHIELD BASE" 1305,2727 r0 top locked
SH20 "LeaderTech 20S-CBS-2x0.5x0.2 - DIVIDE QUANITY REQURIED BY 10!" "SHIELD BASE CORNER" 924,2596 r90 top locked
SH21 "LeaderTech 20S-CBS-2x0.5x0.2 - DIVIDE QUANITY REQURIED BY 10!" "SHIELD BASE" 924,2096 r90 top locked
SH22 "LeaderTech 20S-CBS-2x0.5x0.2 - DIVIDE QUANITY REQURIED BY 10!" "SHIELD BASE" 924,1596 r90 top locked
SH23 "LeaderTech 20S-CBS-2x0.5x0.2 - DIVIDE QUANITY REQURIED BY 10!" "SHIELD BASE" 924,1096 r90 top locked
SH24 "LeaderTech 20S-CBS-2x0.5x0.2 - DIVIDE QUANITY REQURIED BY 10!" "SHIELD BASE" 924,596 r90 top locked
SPI_MISO "TestPoint" TP-3520-SK 4218,1186 r180 bottom
U1_1 "LT1498IS8#PBF-ND" SO8#1 3050,2445 r270 top (schematic designator U1)
U1_2 "LT1498IS8#PBF-ND" SO8#1 3052,1824 r270 top (schematic designator U1)
U1_3 "LT1498IS8#PBF-ND" SO8#1 3057,1215 r270 top (schematic designator U1)
U1_4 "LT1498IS8#PBF-ND" SO8#1 3057,624 r270 top (schematic designator U1)
U2_1 "LT6200" SO8#1 1552,2378 r90 top (schematic designator U2)
U2_2 "LT6200" SO8#1 1552,1758 r90 top (schematic designator U2)
U2_3 "LT6200" SO8#1 1552,1133 r90 top (schematic designator U2)
U2_4 "LT6200" SO8#1 1552,513 r90 top (schematic designator U2)
U3_1 "DAC121S101CIMM/NOPB" MSOP-8 3621.5,2172 r0 bottom (schematic designator U3)
U3_2 "DAC121S101CIMM/NOPB" MSOP-8 3621.5,1547 r0 bottom (schematic designator U3)
U3_3 "DAC121S101CIMM/NOPB" MSOP-8 3621.5,926 r0 bottom (schematic designator U3)
U3_4 "DAC121S101CIMM/NOPB" MSOP-8 3621.5,302 r0 bottom (schematic designator U3)
U4_1 "DAC121S101CIMM/NOPB" MSOP-8 3622.5,2587 r0 bottom (schematic designator U4)
U4_2 "DAC121S101CIMM/NOPB" MSOP-8 3622.5,1962 r0 bottom (schematic designator U4)
U4_3 "DAC121S101CIMM/NOPB" MSOP-8 3622.5,1341 r0 bottom (schematic designator U4)
U4_4 "DAC121S101CIMM/NOPB" MSOP-8 3622.5,717 r0 bottom (schematic designator U4)
U5_1 "AD8138" SO8#1 1942,2338 r90 top (schematic designator U5)
U5_2 "AD8138" SO8#1 1942,1718 r90 top (schematic designator U5)
U5_3 "AD8138" SO8#1 1942,1093 r90 top (schematic designator U5)
U5_4 "AD8138" SO8#1 1942,473 r90 top (schematic designator U5)
U6_1 "DAC121S101CIMM/NOPB" MSOP-8 3619.5,2379 r0 bottom (schematic designator U6)
U6_2 "DAC121S101CIMM/NOPB" MSOP-8 3619.5,1754 r0 bottom (schematic designator U6)
U6_3 "DAC121S101CIMM/NOPB" MSOP-8 3619.5,1133 r0 bottom (schematic designator U6)
U6_4 "DAC121S101CIMM/NOPB" MSOP-8 3619.5,509 r0 bottom (schematic designator U6)
U7_1 "REF43" SO8#1 2479,2234 r90 top (schematic designator U7)
U7_2 "REF43" SO8#1 2481,1613 r90 top (schematic designator U7)
U7_3 "REF43" SO8#1 2486,1004 r90 top (schematic designator U7)
U7_4 "REF43" SO8#1 2486,413 r90 top (schematic designator U7)
U8 "DAC121S101CIMM/NOPB" MSOP-8 3973,466 r270 bottom
U9 "ADT7301ARTZ" SOT23-6 4311,298 r270 bottom
U10 "DS90C032TMX/NOPB" SO16 4466,1755 r180 bottom
U11 "74VHC595" SO16 4261,1855 r0 bottom
U12 "LT3080" D2-PAK-6_LT3080 4340,1555 r90 top
U13 "74VHC595" SO16 4261,2295 r0 bottom
U14 "SN74LVC1G17" SOT23-5 4293.5,815 r180 bottom
U15 "SN74LVC1G07" SOT23-5 4296,575 r180 bottom
U16 "DS92LV010A" SO8#2 4436,1102 r90 bottom

## Footprints (in the part's own frame and the unit in brackets; to place one, negate y for a bottom-side part, rotate by r counter-clockwise, add the part's x,y. Pads: shape width x height; smd on the part's side, far side on the other; paste and mask are expansions set on the pad)
0603 [mil]
  rect 36x32 smd: 1(0,0) 2(60,0)
  silkscreen extent -31,-30 90,30
0805 [mil]
  rect 38.5x52 smd: 1(0,0) 2(70,0)
  silkscreen extent -31,-38 101,38
0805L [mil]
  rect 50x50 smd: 1(-0.4,0.18) 2(83.6,0.18)
  silkscreen extent 31,-20 52,20
1206 [mil]
  rect 45x60 smd: 1(0,0) 2(105,0)
  silkscreen extent -37,-51 144,51
CC3225-1210 [mm]
  rect 1.6x2.7 smd: 1(-1.4,0) 2(1.4,0)
  silkscreen extent -0.3,-1.25 0.3,1.25
D2-PAK-6_LT3080 [mm] "D2-PAK, 6-Pads, Body 9.4x10.5mm (max), IPC Medium Density"
  rect 4.6x1.1 smd: 1(-5.55,3.404) 2(-5.55,1.702) 3(-5.55,0) 4(-5.55,-1.702) 5(-5.55,-3.404)
  rect 9.4x10.672 smd: 6(3.2,0)
  silkscreen extent -5.67,-5.25 -1.9,5.25, body extent -3.9,-5.28 5.5,5.27, height 4.57